# Altium PCB PCB.PcbDoc
Units mm, origin at the board's own origin, x right, y up, seen from the top; angles counter-clockwise.
Board outline 75 x 75 mm, 4 copper layers (Top Copper, Signal Layer 1, Signal Layer 2, Bottom Copper), stack 1.57 mm thick; 26 components, 65 nets, 365 pads, 71 vias.
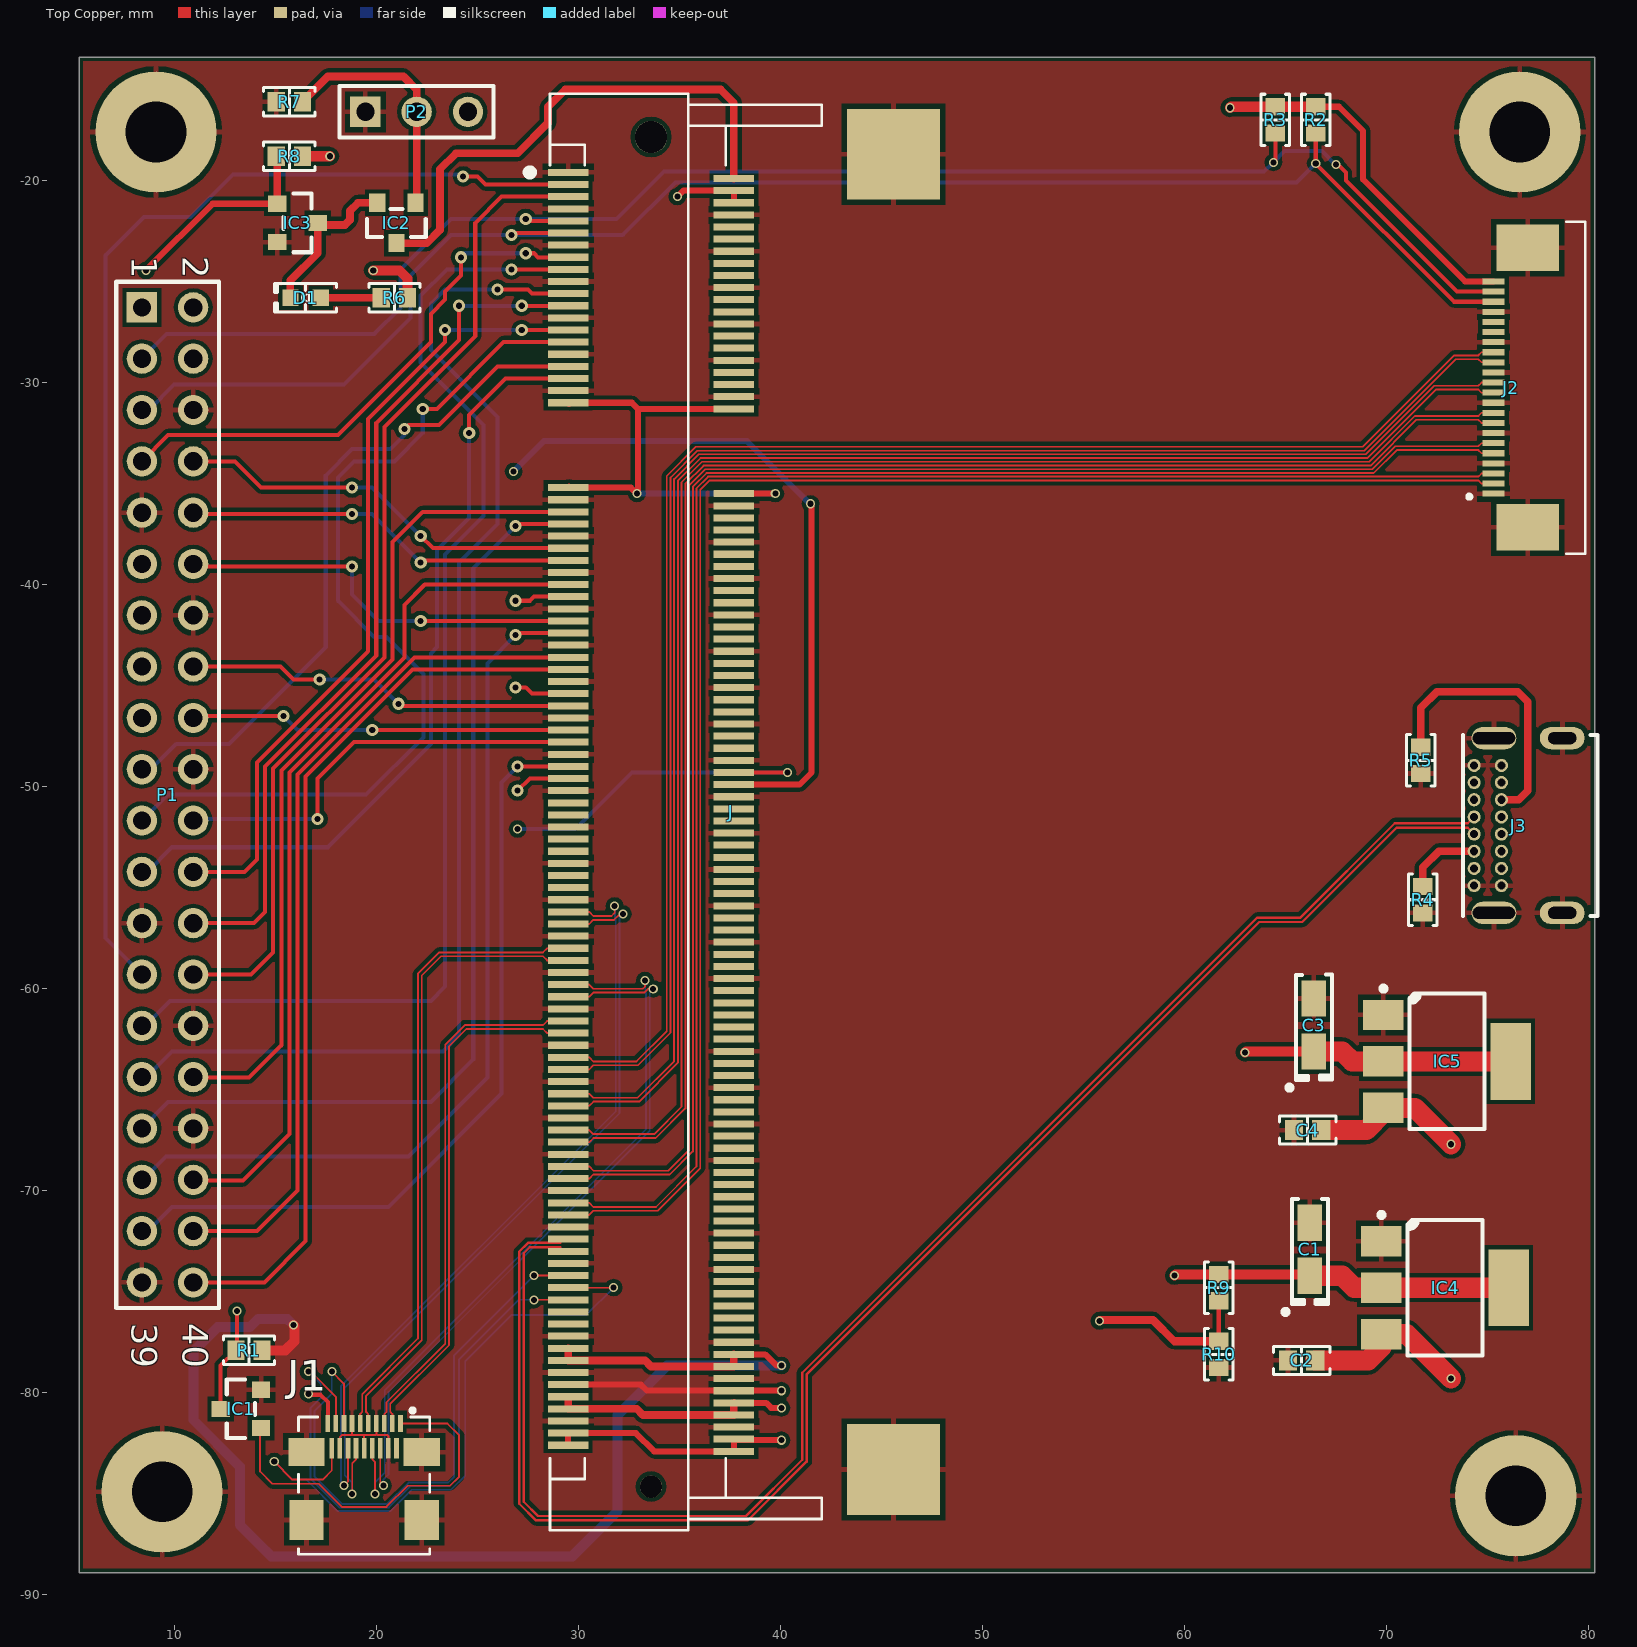
[diagram p0: Top Copper view]
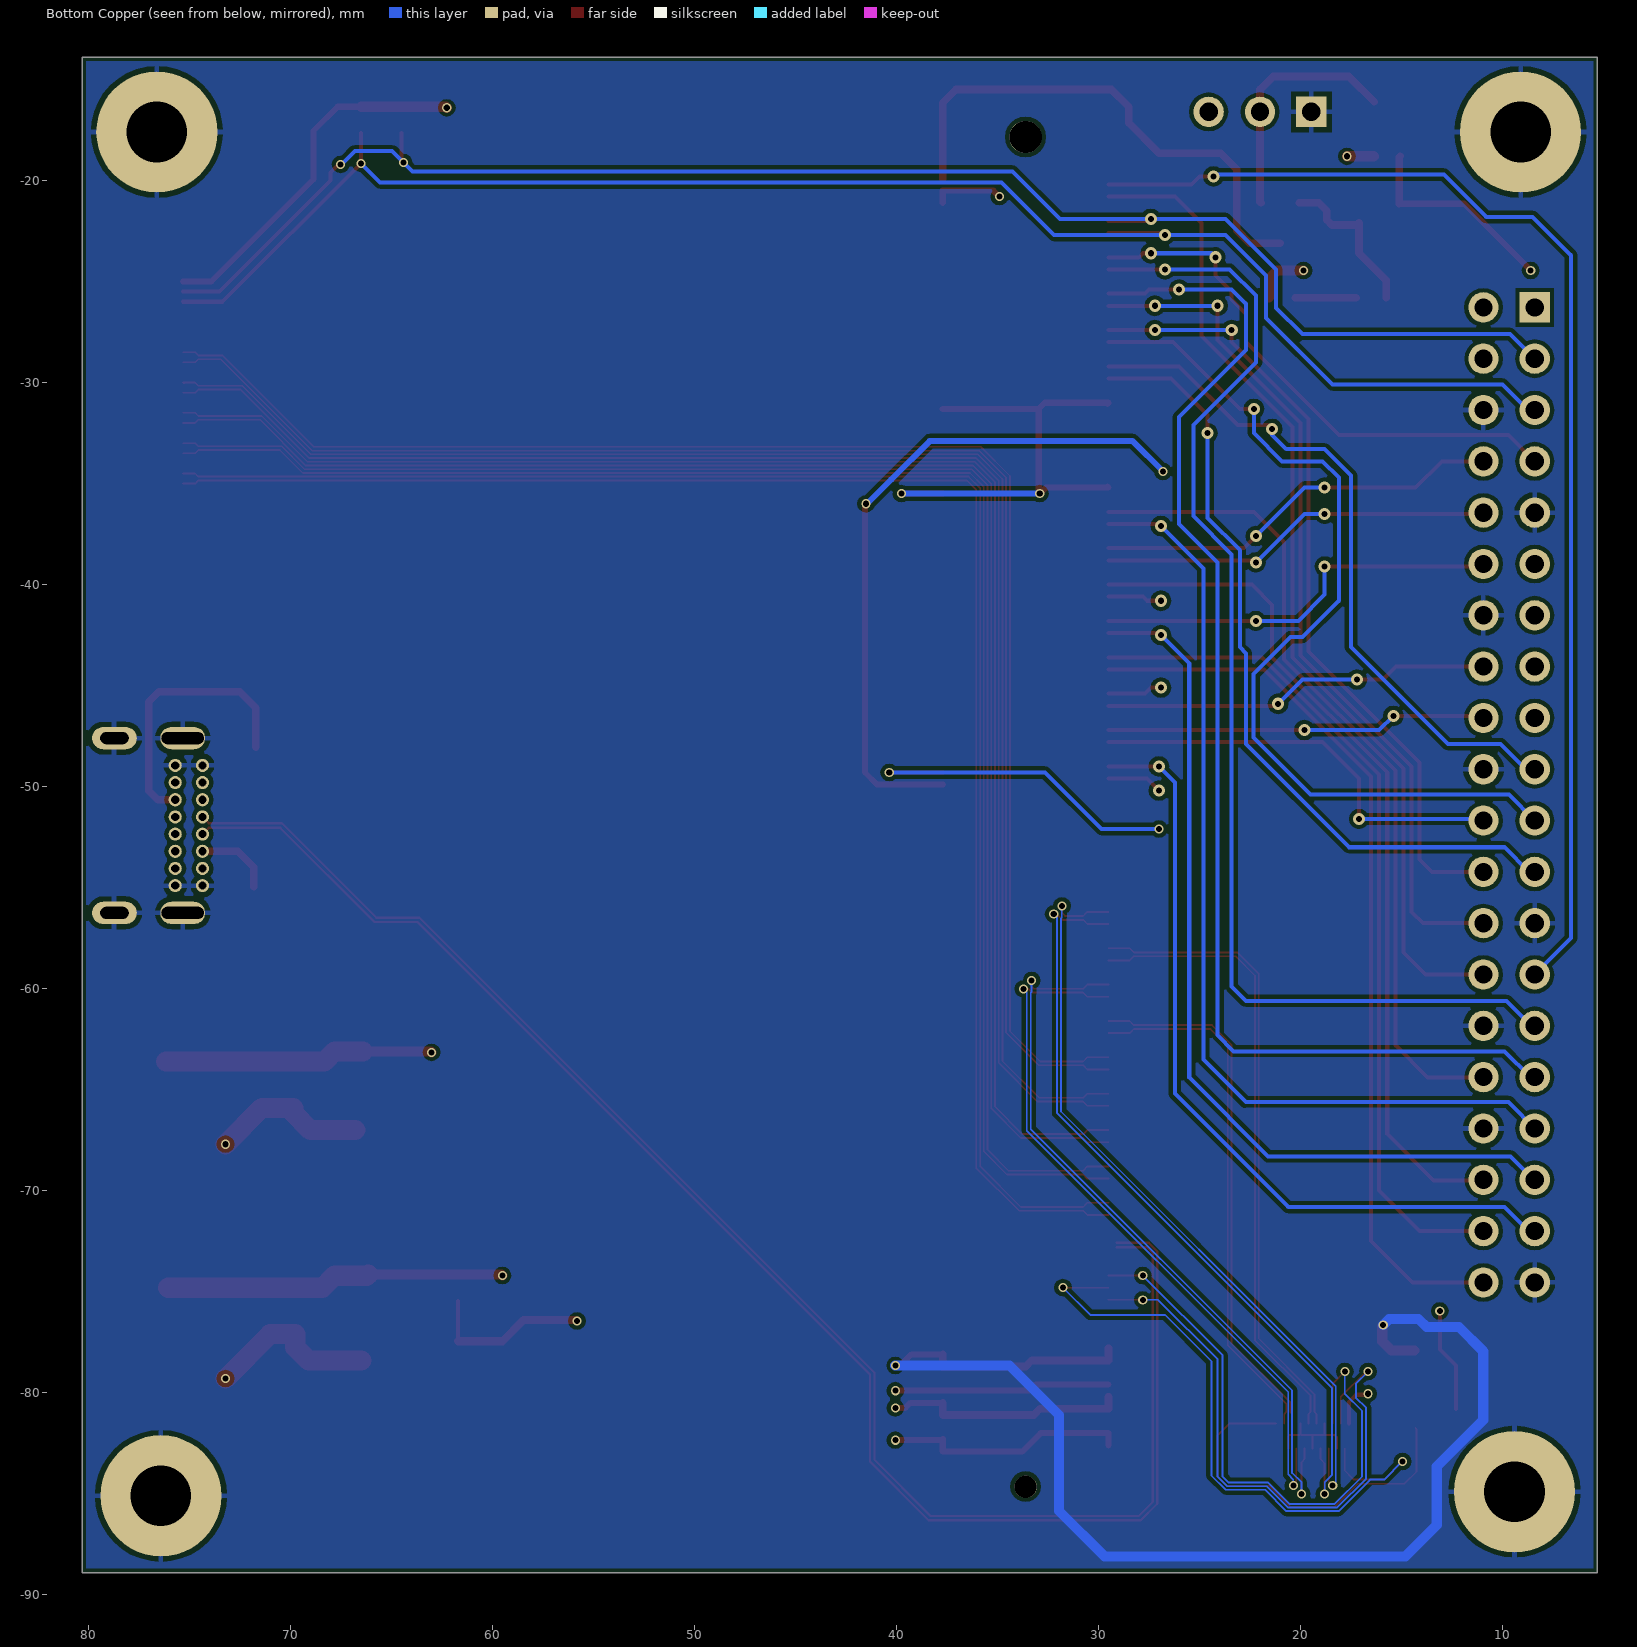
[diagram p1: Bottom Copper view, seen from below]
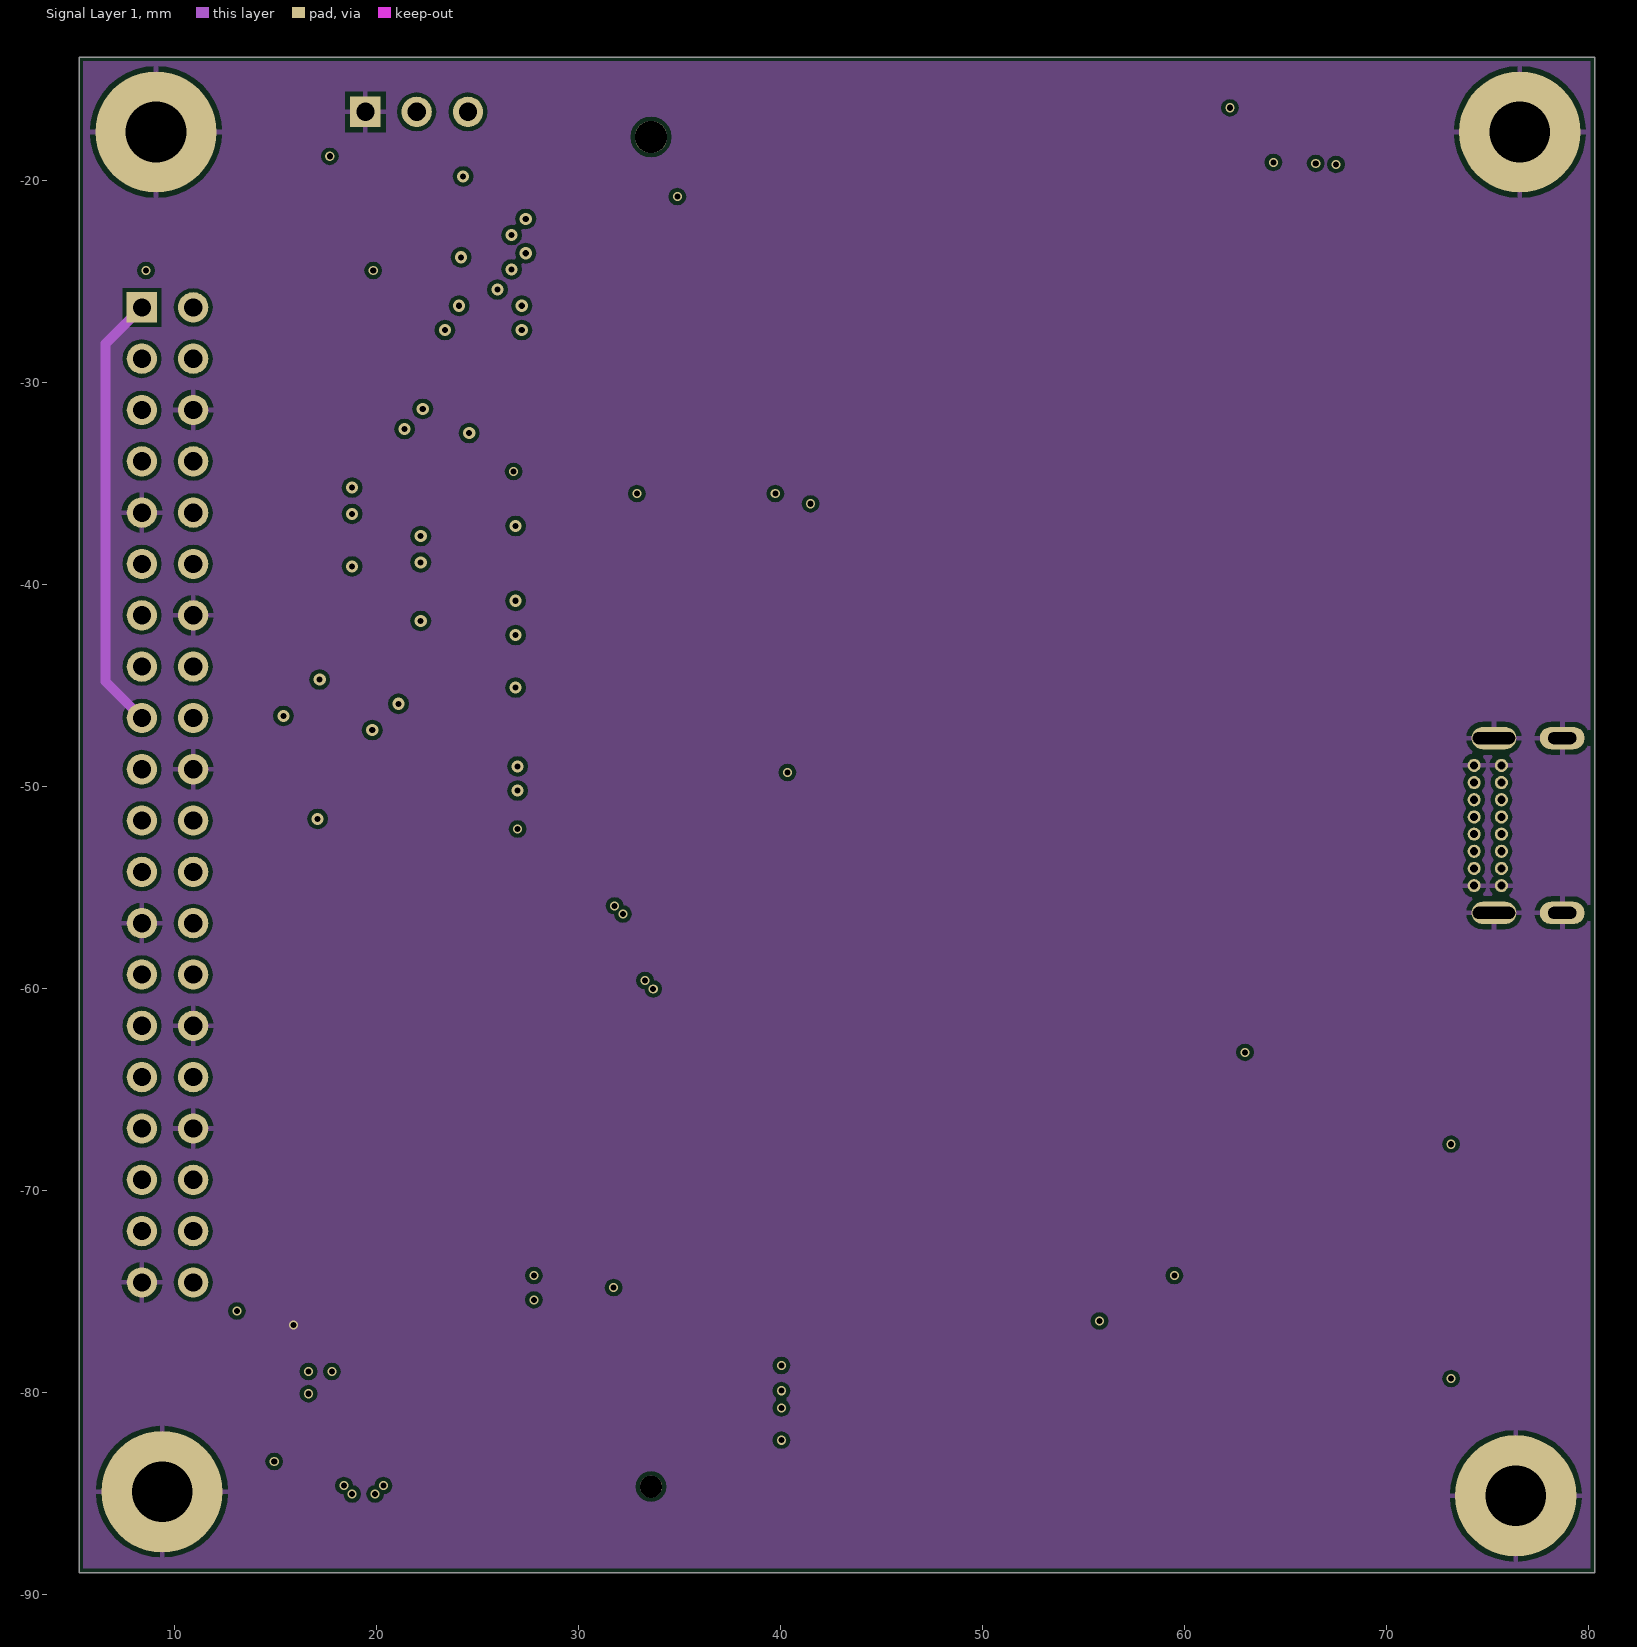
[diagram p2: Signal Layer 1]
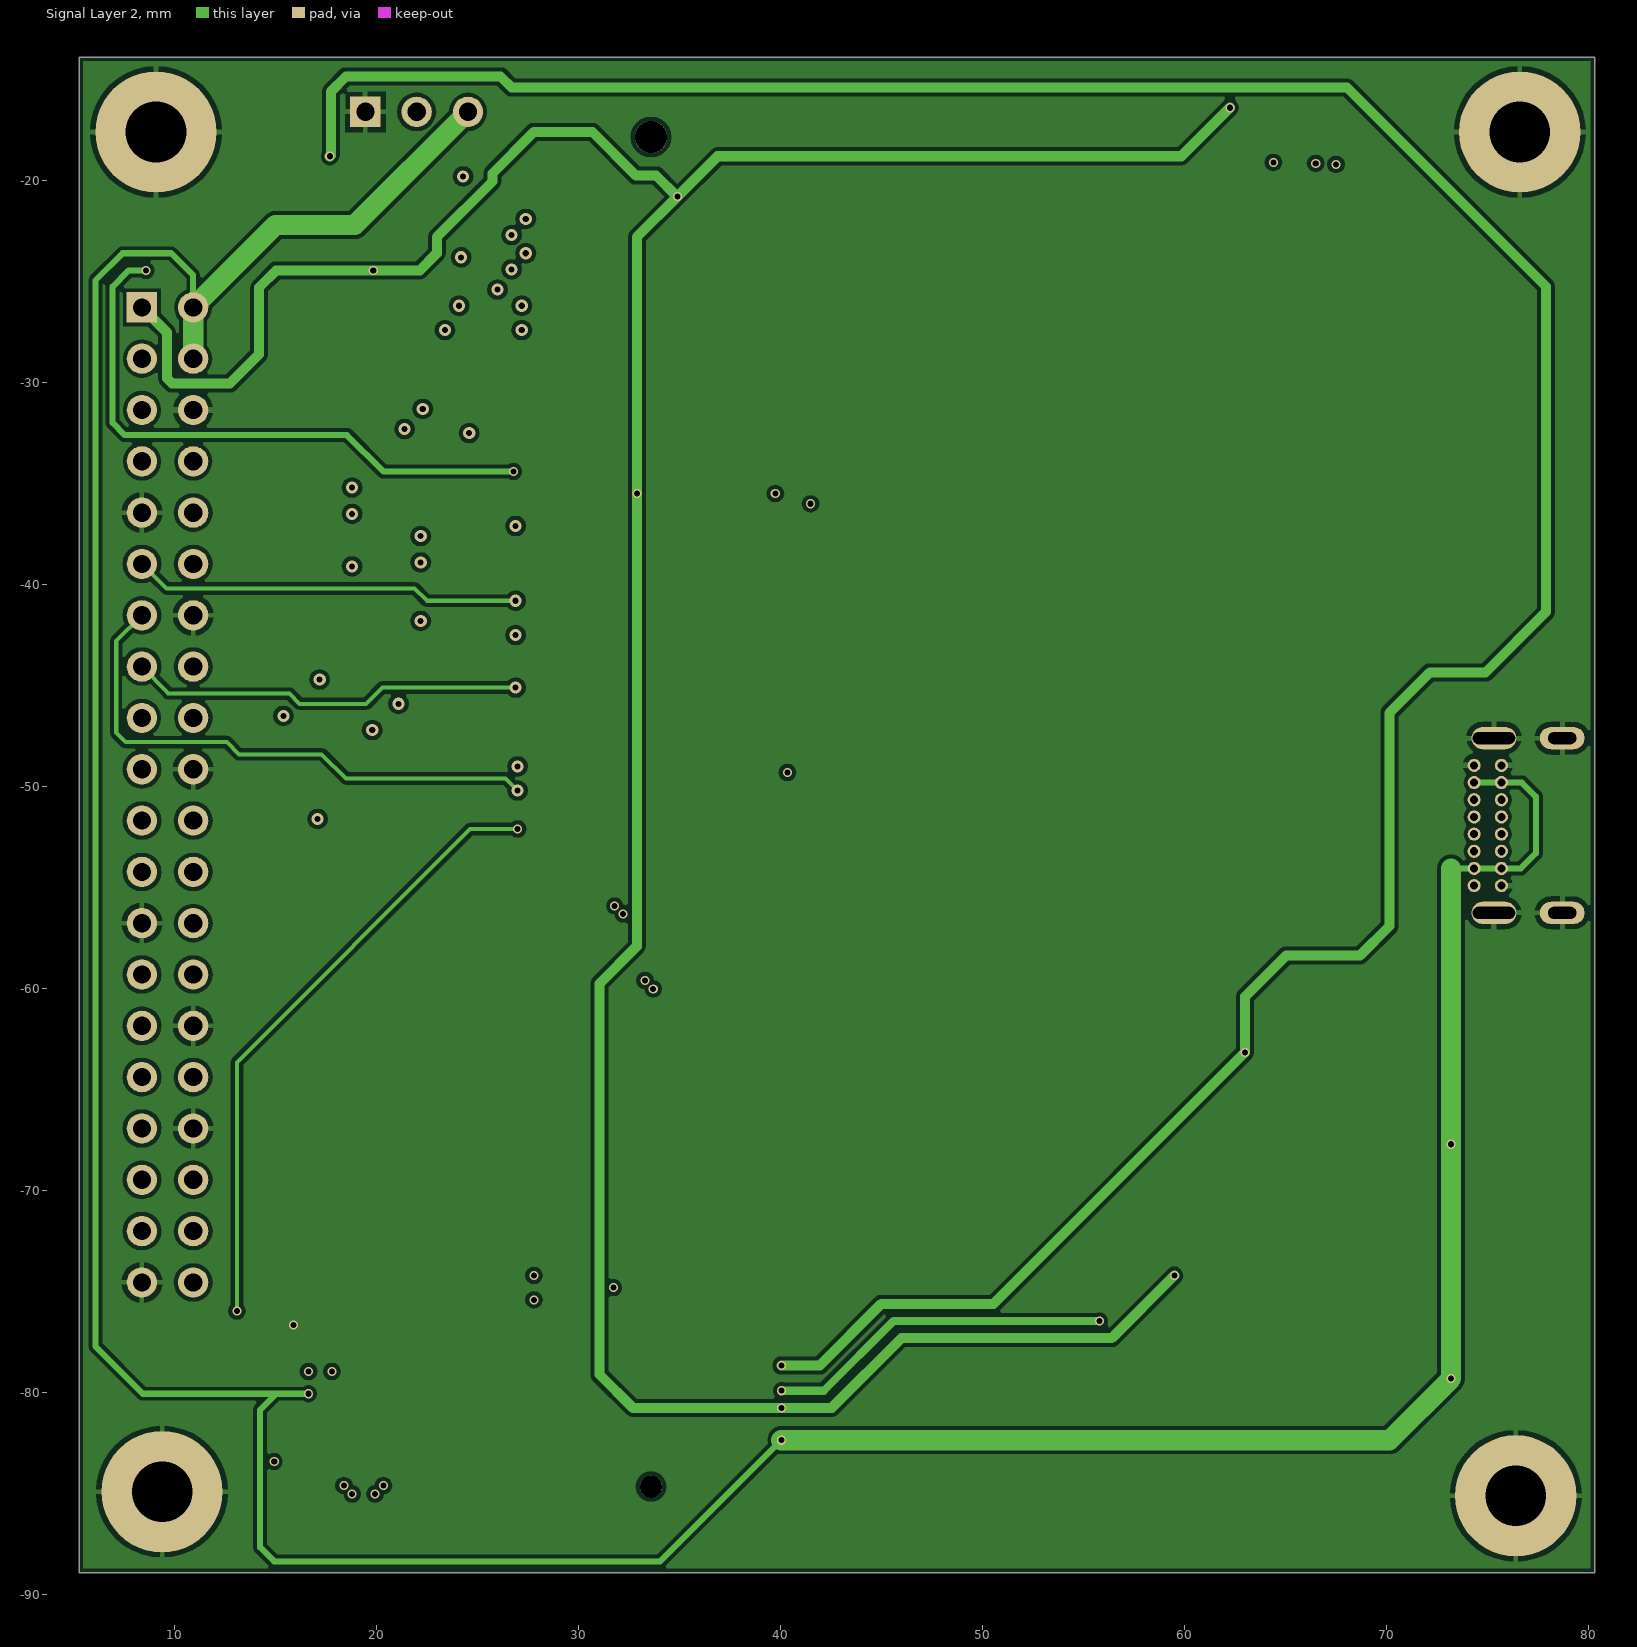
[diagram p3: Signal Layer 2]
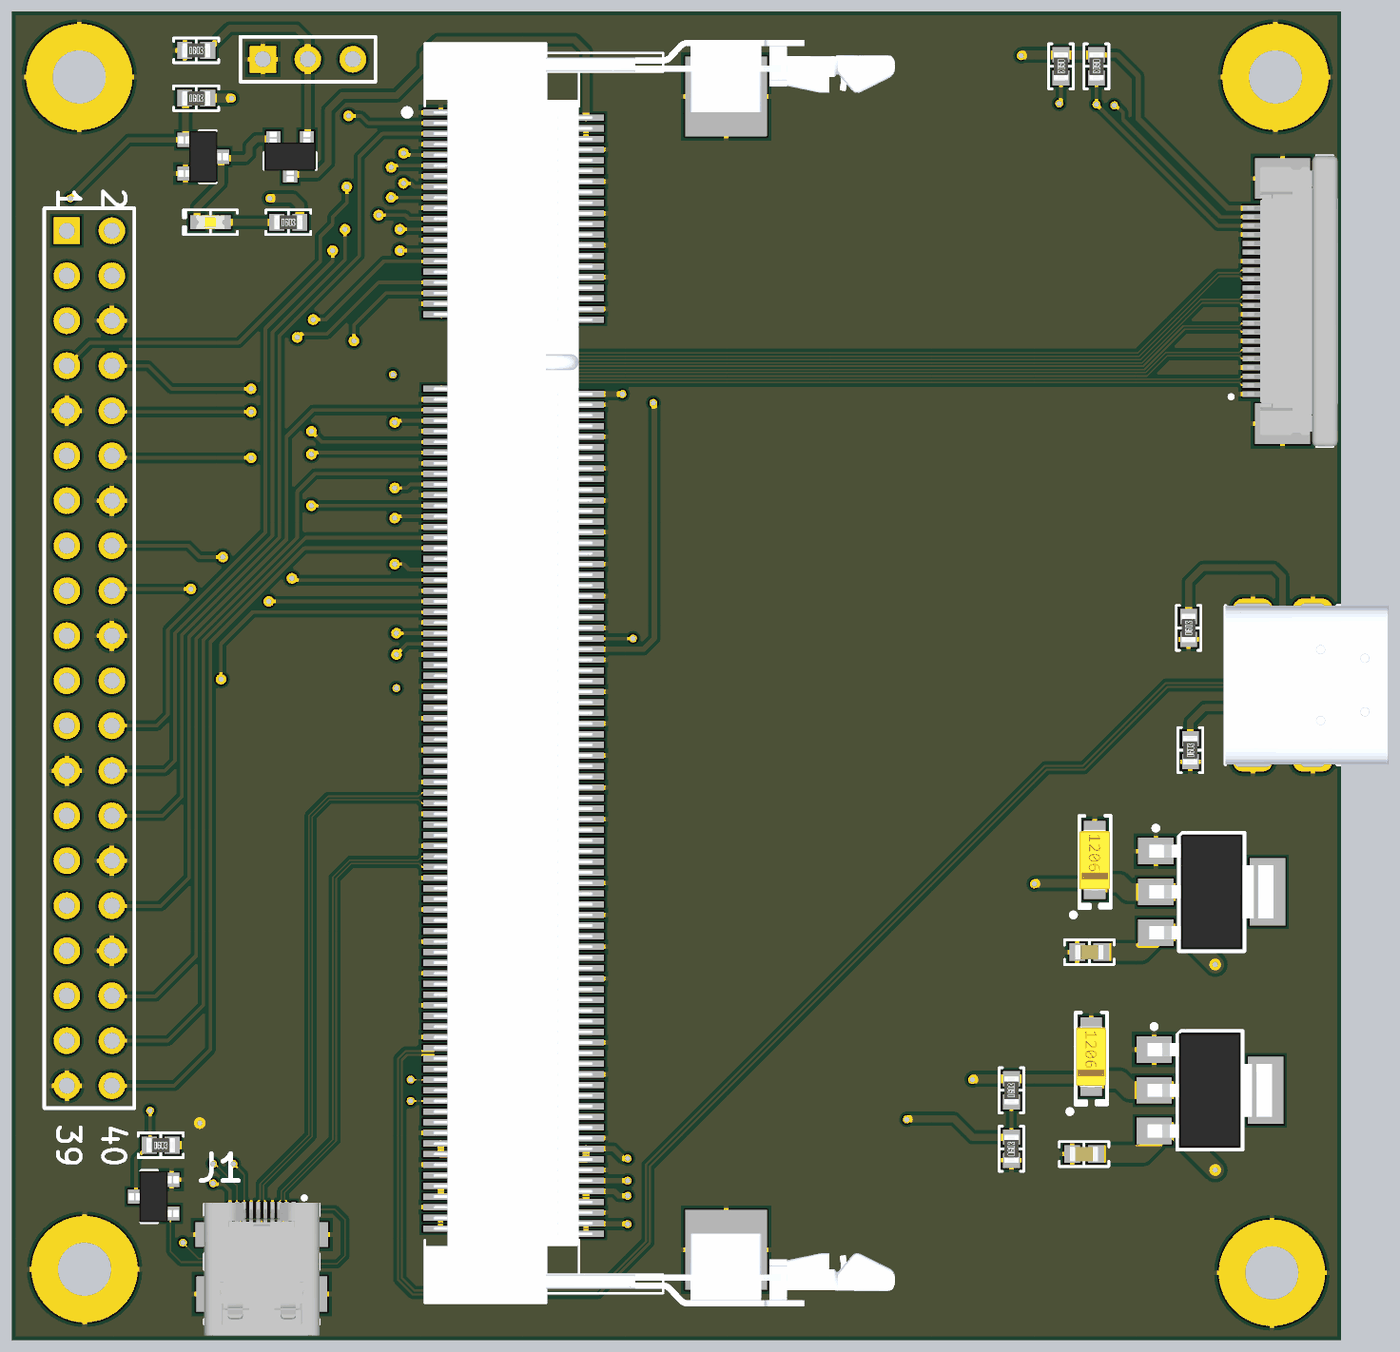
[diagram p4: 3D render of the assembled board from above, using the file's embedded part models]

## Layer stack, top to bottom
Top Mask: solder mask 0.015, Solder Resist, Dk 3.8
Top Copper: signal copper 0.035
Dielectric 1: prepreg 0.1, 2313, Dk 4.05
Signal Layer 1: signal copper 0.0175
Core: core 1.265, FR-4, Dk 4.5
Signal Layer 2: signal copper 0.0175
Dielectric 2: prepreg 0.1, 2313, Dk 4.05
Bottom Copper: signal copper 0.035
Bottom Mask: solder mask 0.015, Solder Resist, Dk 3.8

## Board outline
5.3,-13.9 80.3,-13.9 80.3,-88.9 5.3,-88.9

## Design rules (kind name [scope] priority, off if disabled: settings)
BoardOutlineClearance [All] p1: gap=0.2 ignorepadtopadclearanceinfootprint=FALSE except(0.4: Arc-SplitBarrior Arc-SplitContinuation Track-SplitBarrior Track-SplitContinuation SMDPad-SplitBarrior SMDPad-SplitContinuation THPad-SplitBarrior THPad-SplitContinuation Via-SplitBarrior Via-SplitContinuation Fill-SplitBarrior Fill-SplitContinuation Poly-SplitBarrior Poly-SplitContinuation Region-SplitBarrior Region-SplitContinuation Text-SplitBarrior Text-SplitContinuation)
Clearance "Clearance Bottom Layer" [OnLayer('Bottom Layer')] p1: gap=0.203 ignorepadtopadclearanceinfootprint=TRUE except(0.254: Arc-Text Track-Text SMDPad-Text THPad-Text Via-Text Fill-Text Poly-Text Region-Text Text-Text)
Clearance "Clearance Top Layer" [OnLayer('Top Layer')] p2: gap=0.203 ignorepadtopadclearanceinfootprint=TRUE except(0.254: Arc-Text Track-Text SMDPad-Text THPad-Text Via-Text Fill-Text Poly-Text Region-Text Text-Text)
Clearance [All] p3: gap=0.2 ignorepadtopadclearanceinfootprint=FALSE except(0.089: Arc-Arc Arc-Track Arc-SMDPad Track-Track Track-SMDPad SMDPad-SMDPad; 0.127: Arc-Via Track-Via SMDPad-Via THPad-Via Via-Via; 0.254: Arc-Text Track-Text SMDPad-Text THPad-Text Via-Text Fill-Text Poly-Text Region-Text Text-Text)
DiffPairsRouting DiffPair_CSIDiffPairsRouting [InDifferentialPairClass('CSI')] p1: maxlimit=0.102 minlimit=0.102 mostfreqgap=0.102 toplayer_minwidth=0.089 toplayer_maxwidth=0.089 toplayer_prefwidth=0.089 midlayer1_minwidth=0.089 midlayer1_maxwidth=0.089 midlayer1_prefwidth=0.089 midlayer2_minwidth=0.089 midlayer2_maxwidth=0.089 midlayer2_prefwidth=0.089 bottomlayer_minwidth=0.089 bottomlayer_maxwidth=0.089 bottomlayer_prefwidth=0.089 maxuncoupledlength=12.7
DiffPairsRouting DiffPair_HDMIDiffPairsRouting [InDifferentialPairClass('HDMI')] p2: maxlimit=0.102 minlimit=0.102 mostfreqgap=0.102 toplayer_minwidth=0.089 toplayer_maxwidth=0.089 toplayer_prefwidth=0.089 midlayer1_minwidth=0.089 midlayer1_maxwidth=0.089 midlayer1_prefwidth=0.089 midlayer2_minwidth=0.089 midlayer2_maxwidth=0.089 midlayer2_prefwidth=0.089 bottomlayer_minwidth=0.089 bottomlayer_maxwidth=0.089 bottomlayer_prefwidth=0.089 maxuncoupledlength=12.7
DiffPairsRouting DiffPair_USBDiffPairsRouting [InDifferentialPairClass('USB')] p3: maxlimit=0.102 minlimit=0.102 mostfreqgap=0.102 toplayer_minwidth=0.117 toplayer_maxwidth=0.117 toplayer_prefwidth=0.117 midlayer1_minwidth=0.117 midlayer1_maxwidth=0.117 midlayer1_prefwidth=0.117 midlayer2_minwidth=0.117 midlayer2_maxwidth=0.117 midlayer2_prefwidth=0.117 bottomlayer_minwidth=0.117 bottomlayer_maxwidth=0.117 bottomlayer_prefwidth=0.117 maxuncoupledlength=12.7
DiffPairsRouting [All] p4: maxlimit=0.254 minlimit=0.254 mostfreqgap=0.254 toplayer_minwidth=0.381 toplayer_maxwidth=0.381 toplayer_prefwidth=0.381 midlayer1_minwidth=0.381 midlayer1_maxwidth=0.381 midlayer1_prefwidth=0.381 midlayer2_minwidth=0.381 midlayer2_maxwidth=0.381 midlayer2_prefwidth=0.381 bottomlayer_minwidth=0.381 bottomlayer_maxwidth=0.381 bottomlayer_prefwidth=0.381 maxuncoupledlength=12.7
HoleSize [All] p1: absolutevalues=TRUE maxlimit=6.3 minlimit=0.2 maxpercent=80.000 minpercent=20.000
MatchedLengths DiffPair_CSIMatchedLengths [InDifferentialPairClass('CSI')] p1: tolerance=25.4 checknetsindiffpair=TRUE checkdiffpairvsdiffpair=FALSE checkxsignals=FALSE checkothers=FALSE
MatchedLengths DiffPair_HDMIMatchedLengths [InDifferentialPairClass('HDMI')] p2: tolerance=25.4 checknetsindiffpair=TRUE checkdiffpairvsdiffpair=FALSE checkxsignals=FALSE checkothers=FALSE
MatchedLengths DiffPair_USBMatchedLengths [InDifferentialPairClass('USB')] p3: tolerance=25.4 checknetsindiffpair=TRUE checkdiffpairvsdiffpair=FALSE checkxsignals=FALSE checkothers=FALSE
MinimumAnnularRing [All] p1: minimumring=0.076
MinimumSolderMaskSliver [All] p1: minsoldermaskwidth=0.1
PolygonConnect [All] p1: connectstyle=Relief reliefconductorwidth=0.254 reliefentries=4 polygonreliefangle="90 Angle" airgapwidth=0.254
RoomDefinition Sheet [InComponentClass('Sheet')] p1: confinementstyle=ConfineIn formatcopy=TRUE lockcomponents=FALSE outline -25.296,-154.408 25.504,-154.408 25.504,-129.008 -25.296,-129.008
RoutingCorners [All] p1: cornerstyle=Round minsetback=2.54 maxsetback=2.54
RoutingVias [All] p1: holewidth=0.3 width=0.45 viastyle="Through Hole" minholewidth=0.2 minwidth=0.45 maxholewidth=0.3 maxwidth=0.45
SilkToSilkClearance [All] p1: silktosilkclearance=0.1
SilkToSolderMaskClearance [IsPad] p1: minsilkscreentomaskgap=0.1 clearancetoexposedcopper=TRUE
SolderMaskExpansion [All] p1: expansion=0.102
Width [All] p1: maxlimit=2.54 minlimit=0.089 preferedwidth=0.381
24 further rules are at their usual default settings.

## Classes and differential pairs
differential pair class CSI: CAM1_CK CAM1_D0 CAM1_D1 CAM1_D2 CAM1_D3
differential pair class USB: USB_D
differential pair class HDMI: HDMI_CK HDMI_D0 HDMI_D1 HDMI_D2
differential pair USB_D: +USB_D_P -USB_D_N
differential pair HDMI_D2: +HDMI_D2_P -HDMI_D2_N
differential pair HDMI_D1: +HDMI_D1_P -HDMI_D1_N
differential pair HDMI_D0: +HDMI_D0_P -HDMI_D0_N
differential pair HDMI_CK: +HDMI_CK_P -HDMI_CK_N
differential pair CAM1_D3: +CAM1_D3_P -CAM1_D3_N
differential pair CAM1_D2: +CAM1_D2_P -CAM1_D2_N
differential pair CAM1_D1: +CAM1_D1_P -CAM1_D1_N
differential pair CAM1_D0: +CAM1_D0_P -CAM1_D0_N
differential pair CAM1_CK: +CAM1_CK_P -CAM1_CK_N

## Components (designator, comment, footprint, x,y, rotation, side; value= is the part's Value field where it differs from the comment)
C1 "10µF" "CAP POL 1206_3216" 66.2,-72.9 r90 top
C2 "0.1uF" "CAP 0603_1608" 65.8,-78.4 r0 top
C3 "10µF" "CAP POL 1206_3216" 66.4,-61.8 r90 top
C4 "0.1uF" "CAP 0603_1608" 66.1,-67 r0 top
D1 "Yellow" "LED 0603_1608 YELLOW" 16.5,-25.8 r180 top
IC1 "DMG3414U-7" "DIODES SOT-23-3" 13.3,-80.8 r180 top
IC2 "DMG3414U-7" "DIODES SOT-23-3" 21,-22.1 r270 top
IC3 "DMG3414U-7" "DIODES SOT-23-3" 16.1,-22.1 r0 top
IC4 "LD1117S33TR" "ST SOT-223" 72.9,-74.8 r0 top
IC5 "LD1117S18TR" "ST SOT-223" 73,-63.6 r0 top
J "1473149-4" TE_1473149-4 33.6,-51.25 r90 top
J1 "0467650301" MOLEX_0467650301 19.4,-81.525 r0 top
J2 "2-1734592-2" TE_2-1734592-2 75.3,-30.25 r90 top
J3 "USB4085-GF-A_REVA" GCT_USB4085-GF-A_REVA 78.365,-51.925 r90 top
P1 "Header 20X2" HDR2X20 8.4,-26.28 r270 top
P2 "Header 3" HDR1X3 19.46,-16.6 r0 top
R1 "100 kOhms" "RES 0603_1608" 13.7,-77.9 r0 top
R2 "1.8 kOhms" "RES 0603_1608" 66.5,-17 r270 top
R3 "1.8 kOhms" "RES 0603_1608" 64.5,-17 r270 top
R4 "5.1 kOhms" "RES 0603_1608" 71.8,-55.6 r90 top
R5 "5.1 kOhms" "RES 0603_1608" 71.7,-48.7 r90 top
R6 "470 Ohms" "RES 0603_1608" 20.9,-25.8 r0 top
R7 "47 kOhms" "RES 0603_1608" 15.7,-16.1 r0 top
R8 "100 kOhms" "RES 0603_1608" 15.7,-18.8 r0 top
R9 "1.8 kOhms" "RES 0603_1608" 61.7,-74.8 r90 top
R10 "10 kOhms" "RES 0603_1608" 61.7,-78.1 r90 top

## Footprints (in the part's own frame and the unit in brackets; to place one, negate y for a bottom-side part, rotate by r counter-clockwise, add the part's x,y. Pads: shape width x height; smd on the part's side, far side on the other; paste and mask are expansions set on the pad)
"CAP 0603_1608" [mm] "Chip Capacitor, 2-Leads, Body 1.60x0.80mm, IPC Medium Density"
  rect 0.9x1 smd: 1(-0.675,0) 2(0.675,0)
  silkscreen extent -1.4,-0.7 1.4,0.7, body extent -0.8,-0.41 0.8,0.41, height 0.82
"CAP POL 1206_3216" [mm] "Molded Capacitor, 2-Leads, Body 3.20x1.6mm, IPC Medium Density"
  rect 1.8x1.23 smd: 1(-1.31,0) 2(1.31,0)
  silkscreen extent -3.22,-0.9 2.5,1.32, body extent -1.72,-0.85 1.71,0.85, height 1.7
"DIODES SOT-23-3" [mm] "SOT23, 3-Leads, Body 2.90x2.40mm, Pitch 0.95mm, IPC Medium Density"
  rect 0.9x0.8 smd: 1(-1,0.95) 2(-1,-0.95) 3(1,0)
  silkscreen extent -0.7,-1.45 0.7,1.45, body extent -1.41,-1.45 1.41,1.45, height 1.5
GCT_USB4085-GF-A_REVA [mm]
  round 0.65 hole 0.4: A1(-2.975,4.025) A4(-2.125,4.025) A5(-1.275,4.025) A6(-0.425,4.025) A7(0.425,4.025) A8(1.275,4.025) A9(2.125,4.025) A12(2.975,4.025) B1(2.975,2.675) B4(2.125,2.675) B5(1.275,2.675) B6(0.425,2.675) B7(-0.425,2.675) B8(-1.275,2.675) B9(-2.125,2.675) B12(-2.975,2.675)
  oval 1.108x2.216 hole 0.6 slot 2.1 at 90 deg: P1(-4.325,3.045) P2(4.325,3.045)
  oval 1.108x2.216 hole 0.6 slot 1.4 at 90 deg: P3(4.325,-0.335) P4(-4.325,-0.335)
  silkscreen extent -4.47,-2.07 4.47,4.58, body extent -4.48,-4.58 4.48,4.58, height 3.46
HDR1X3 [mm] "Connector; Header; 3 Position"
  rect 1.5x1.5 hole 0.9: 1(0,0)
  round 1.5 hole 0.9: 2(2.54,0) 3(5.08,0)
  silkscreen extent -1.27,-1.27 6.35,1.27
HDR2X20 [mm] "Connector; Header; 20x2 Position"
  rect 1.5x1.5 hole 0.9: 1(0,0)
  round 1.5 hole 0.9: 2(0,2.54) 3(2.54,0) 4(2.54,2.54) 5(5.08,0) 6(5.08,2.54) 7(7.62,0) 8(7.62,2.54) 9(10.16,0) 10(10.16,2.54) 11(12.7,0) 12(12.7,2.54) 13(15.24,0) 14(15.24,2.54) 15(17.78,0) 16(17.78,2.54) 17(20.32,0) 18(20.32,2.54) 19(22.86,0) 20(22.86,2.54) 21(25.4,0) 22(25.4,2.54) 23(27.94,0) 24(27.94,2.54) 25(30.48,0) 26(30.48,2.54) 27(33.02,0) 28(33.02,2.54) 29(35.56,0) 30(35.56,2.54) 31(38.1,0) 32(38.1,2.54) 33(40.64,0) 34(40.64,2.54) 35(43.18,0) 36(43.18,2.54) 37(45.72,0) 38(45.72,2.54) 39(48.26,0) 40(48.26,2.54)
  silkscreen extent -1.27,-1.27 49.53,3.81
"LED 0603_1608 YELLOW" [mm] "Chip Diode, 2-Leads, Body 1.60x0.80mm, IPC Medium Density"
  rect 0.8x0.8 smd: 1(-0.75,0) 2(0.75,0)
  silkscreen extent -1.52,-0.7 1.52,0.7, body extent -0.8,-0.4 0.8,0.4, height 0.53
MOLEX_0467650301 [mm]
  rect 0.23x0.85 smd: 1(1.8,0) 3(1.4,0) 5(1,0) 7(0.6,0) 9(0.2,0) 11(-0.2,0) 13(-0.6,0) 15(-1,0) 17(-1.4,0) 19(-1.8,0)
  rect 0.23x1 smd: 2(1.6,-1.225) 4(1.2,-1.225) 6(0.8,-1.225) 8(0.4,-1.225) 10(0,-1.225) 12(-0.4,-1.225) 14(-0.8,-1.225) 16(-1.2,-1.225) 18(-1.6,-1.225)
  rect 1.8x1.38 smd: S1(-2.85,-1.415) S2(2.85,-1.415)
  rect 1.7x2 smd: S3(-2.85,-4.775) S4(2.85,-4.775)
  silkscreen extent -3.25,-6.48 3.25,0.75, body extent -3.25,-7.12 3.25,0.38, height 2.92
"RES 0603_1608" [mm] "Chip Resistor, 2-Leads, Body 1.60x0.80mm, IPC Medium Density"
  rect 0.85x0.95 smd: 1(-0.65,0) 2(0.65,0)
  silkscreen extent -1.27,-0.7 1.27,0.7, body extent -0.8,-0.4 0.8,0.4, height 0.45
"ST SOT-223" [mm] "SOT223, 4-Leads, Body 6.50x7.00mm (avg), Pitch 2.30mm, IPC Medium Density"
  rect 2x1.5 smd: 1(-3.15,2.3) 2(-3.15,0) 3(-3.15,-2.3)
  rect 2x3.8 smd: 4(3.15,0)
  silkscreen extent -3.27,-3.35 1.85,3.72, body extent -3.52,-3.25 3.5,3.25, height 1.8
TE_2-1734592-2 [mm]
  rect 0.3x1.1 smd: 1(-5.25,0) 2(-4.75,0) 3(-4.25,0) 4(-3.75,0) 5(-3.25,0) 6(-2.75,0) 7(-2.25,0) 8(-1.75,0) 9(-1.25,0) 10(-0.75,0) 11(-0.25,0) 12(0.25,0) 13(0.75,0) 14(1.25,0) 15(1.75,0) 16(2.25,0) 17(2.75,0) 18(3.25,0) 19(3.75,0) 20(4.25,0) 21(4.75,0) 22(5.25,0)
  rect 2.3x3.1 smd: S1(-6.92,-1.7) S2(6.92,-1.7)
  silkscreen extent -8.22,-4.55 8.22,1.3, body extent -8.21,-4.84 8.22,0.27, height 2
TE_1473149-4 [mm]
  rect 0.35x2 smd: 1(31.65,4.1) 2(31.35,-4.1) 3(31.05,4.1) 4(30.75,-4.1) 5(30.45,4.1) 6(30.15,-4.1) 7(29.85,4.1) 8(29.55,-4.1) 9(29.25,4.1) 10(28.95,-4.1) 11(28.65,4.1) 12(28.35,-4.1) 13(28.05,4.1) 14(27.75,-4.1) 15(27.45,4.1) 16(27.15,-4.1) 17(26.85,4.1) 18(26.55,-4.1) 19(26.25,4.1) 20(25.95,-4.1) 21(25.65,4.1) 22(25.35,-4.1) 23(25.05,4.1) 24(24.75,-4.1) 25(24.45,4.1) 26(24.15,-4.1) 27(23.85,4.1) 28(23.55,-4.1) 29(23.25,4.1) 30(22.95,-4.1) 31(22.65,4.1) 32(22.35,-4.1) 33(22.05,4.1) 34(21.75,-4.1) 35(21.45,4.1) 36(21.15,-4.1) 37(20.85,4.1) 38(20.55,-4.1) 39(20.25,4.1) 40(19.95,-4.1) 41(16.05,4.1) 42(15.75,-4.1) 43(15.45,4.1) 44(15.15,-4.1) 45(14.85,4.1) 46(14.55,-4.1) 47(14.25,4.1) 48(13.95,-4.1) 49(13.65,4.1) 50(13.35,-4.1) 51(13.05,4.1) 52(12.75,-4.1) 53(12.45,4.1) 54(12.15,-4.1) 55(11.85,4.1) 56(11.55,-4.1) 57(11.25,4.1) 58(10.95,-4.1) 59(10.65,4.1) 60(10.35,-4.1) 61(10.05,4.1) 62(9.75,-4.1) 63(9.45,4.1) 64(9.15,-4.1) 65(8.85,4.1) 66(8.55,-4.1) 67(8.25,4.1) 68(7.95,-4.1) 69(7.65,4.1) 70(7.35,-4.1) 71(7.05,4.1) 72(6.75,-4.1) 73(6.45,4.1) 74(6.15,-4.1) 75(5.85,4.1) 76(5.55,-4.1) 77(5.25,4.1) 78(4.95,-4.1) 79(4.65,4.1) 80(4.35,-4.1) 81(4.05,4.1) 82(3.75,-4.1) 83(3.45,4.1) 84(3.15,-4.1) 85(2.85,4.1) 86(2.55,-4.1) 87(2.25,4.1) 88(1.95,-4.1) 89(1.65,4.1) 90(1.35,-4.1) 91(1.05,4.1) 92(0.75,-4.1) 93(0.45,4.1) 94(0.15,-4.1) 95(-0.15,4.1) 96(-0.45,-4.1) 97(-0.75,4.1) 98(-1.05,-4.1) 99(-1.35,4.1) 100(-1.65,-4.1) 101(-1.95,4.1) 102(-2.25,-4.1) 103(-2.55,4.1) 104(-2.85,-4.1) 105(-3.15,4.1) 106(-3.45,-4.1) 107(-3.75,4.1) 108(-4.05,-4.1) 109(-4.35,4.1) 110(-4.65,-4.1) 111(-4.95,4.1) 112(-5.25,-4.1) 113(-5.55,4.1) 114(-5.85,-4.1) 115(-6.15,4.1) 116(-6.45,-4.1) 117(-6.75,4.1) 118(-7.05,-4.1) 119(-7.35,4.1) 120(-7.65,-4.1) 121(-7.95,4.1) 122(-8.25,-4.1) 123(-8.55,4.1) 124(-8.85,-4.1) 125(-9.15,4.1) 126(-9.45,-4.1) 127(-9.75,4.1) 128(-10.05,-4.1) 129(-10.35,4.1) 130(-10.65,-4.1) 131(-10.95,4.1) 132(-11.25,-4.1) 133(-11.55,4.1) 134(-11.85,-4.1) 135(-12.15,4.1) 136(-12.45,-4.1) 137(-12.75,4.1) 138(-13.05,-4.1) 139(-13.35,4.1) 140(-13.65,-4.1) 141(-13.95,4.1) 142(-14.25,-4.1) 143(-14.55,4.1) 144(-14.85,-4.1) 145(-15.15,4.1) 146(-15.45,-4.1) 147(-15.75,4.1) 148(-16.05,-4.1) 149(-16.35,4.1) 150(-16.65,-4.1) 151(-16.95,4.1) 152(-17.25,-4.1) 153(-17.55,4.1) 154(-17.85,-4.1) 155(-18.15,4.1) 156(-18.45,-4.1) 157(-18.75,4.1) 158(-19.05,-4.1) 159(-19.35,4.1) 160(-19.65,-4.1) 161(-19.95,4.1) 162(-20.25,-4.1) 163(-20.55,4.1) 164(-20.85,-4.1) 165(-21.15,4.1) 166(-21.45,-4.1) 167(-21.75,4.1) 168(-22.05,-4.1) 169(-22.35,4.1) 170(-22.65,-4.1) 171(-22.95,4.1) 172(-23.25,-4.1) 173(-23.55,4.1) 174(-23.85,-4.1) 175(-24.15,4.1) 176(-24.45,-4.1) 177(-24.75,4.1) 178(-25.05,-4.1) 179(-25.35,4.1) 180(-25.65,-4.1) 181(-25.95,4.1) 182(-26.25,-4.1) 183(-26.55,4.1) 184(-26.85,-4.1) 185(-27.15,4.1) 186(-27.45,-4.1) 187(-27.75,4.1) 188(-28.05,-4.1) 189(-28.35,4.1) 190(-28.65,-4.1) 191(-28.95,4.1) 192(-29.25,-4.1) 193(-29.55,4.1) 194(-29.85,-4.1) 195(-30.15,4.1) 196(-30.45,-4.1) 197(-30.75,4.1) 198(-31.05,-4.1) 199(-31.35,4.1) 200(-31.65,-4.1)
  rect 4.5x4.6 smd: SH1(-32.55,-12) SH2(32.55,-12)
  round 1.1 hole 1.1 unplated: ""(-33.4,0)
  round 1.6 hole 1.6 unplated: ""(33.4,0)
  silkscreen extent -35.55,-8.45 35.55,6.1, body extent -35.75,-21.52 35.75,5.02, height 5.86

## Part data
C1 C3: library part TR3A475K020C1800, "CAP TANT 4.7UF 10% 20V 1206", Capacitance=4.7µF, Device Package="1206 (3216 Metric)", ESR (Equivalent Series Resistance)=1.8Ohm, Manufacturer="Vishay Sprague", Manufacturer Size Code=A, Operating Temperature="-55°C ~ 125°C", Supplier Part Number 1=718-1830-1-ND, Tolerance=±10%, Voltage - Rated=20V, ComponentLink1Description=Datasheet, ComponentLink1URL=http://www.vishay.com/docs/40080/tr3.pdf, ComponentLink2Description="DigiKey Link", ComponentLink2URL=http://digikey.com/product-detail/en/vishay-sprague/TR3A475K020C1800/718-1830-1-ND/2259990, Features="General Purpose", Height - Seated (Max)="0.071\" (1.80mm)", LastUpdated="02-09-2020 1.15.59 AM", Lifecycle Status=Active, Minimum Order=1, Mounting Type="Surface Mount", Package / Case="1206 (3216 Metric)", Packaging=TapeAndReel, PartId=139, Part Number=TR3A475K020C1800, Part Status=Active, Price=0.35, Series="TANTAMOUNT®, TR3", Size / Dimension="0.126\" L x 0.063\" W (3.20mm x 1.60mm)", Supplier 1=DigiKey, Type=Molded
C2 C4: library part CC0603KRX7RABB102, "CAP CER 0.1uF 200V X7R 0603", Capacitance=1000pF, Device Package="0603 (1608 Metric)", Manufacturer=Yageo, Operating Temperature="-55°C ~ 125°C", Supplier Part Number 1=311-4103-1-ND, Temperature Coefficient=X7R, Tolerance=±10%, Voltage - Rated=200V, Applications="General Purpose", ComponentLink1Description=Datasheet, ComponentLink1URL=http://www.yageo.com/documents/recent/UPY-NP0X7R_MV_100-to-630V_21.pdf, ComponentLink2Description="DigiKey Link", ComponentLink2URL=http://digikey.com/product-detail/en/yageo/CC0603KRX7RABB102/311-4103-1-ND/8025192, LastUpdated="02-09-2020 1.03.36 AM", Lifecycle Status=Active, Minimum Order=1, Mounting Type="Surface Mount, MLCC", Package / Case="0603 (1608 Metric)", Packaging=TapeAndReel, PartId=2225, Part Number=CC0603KRX7RABB102, Part Status=Active, Price=0.02, Series=CC, Size / Dimension="0.063\" L x 0.031\" W (1.60mm x 0.80mm)", Supplier 1=DigiKey, Thickness (Max)="0.035\" (0.90mm)"
D1: library part FKY1111C-TR, "LED YELLOW DIFFUSED SMD", Current - Test=20mA, Device Package="0603 (1608 Metric)", Lens Color=White, Manufacturer="Stanley Electric Co", Millicandela Rating=270mcd, Supplier Device Package=1608, Supplier Part Number 1=404-1273-1-ND, Voltage - Forward (Vf) (Typ)=2.1V, Color=Yellow, ComponentLink1Description=Datasheet, ComponentLink1URL=http://www.stanley-components.com/php/downloaddatafile.php?rp=0,FKY1111C-TR_e.pdf, ComponentLink2Description="DigiKey Link", ComponentLink2URL=http://digikey.com/product-detail/en/stanley-electric-co/FKY1111C-TR/404-1273-1-ND/9477278, Configuration=Standard, Height (Max)=0.80mm, LastUpdated="02-09-2020 1.21.17 AM", Lens Size="1.20mm x 0.80mm", Lens Style="Rectangle with Flat Top", Lens Transparency=Diffused, Lifecycle Status=Active, Minimum Order=1, Mounting Type="Surface Mount", Package / Case="0603 (1608 Metric)", Packaging=TapeAndReel, PartId=154, Part Number=FKY1111C-TR, Part Status=Active, Price=0.11, Series=1111C, Size / Dimension="1.60mm L x 0.80mm W", Supplier 1=DigiKey, Wavelength - Dominant=589nm, Wavelength - Peak=592nm
IC1 IC2 IC3: "MOSFET N-CH 20V 4.2A SOT23", Current - Continuous Drain (Id) @ 25°C="4.2A (Ta)", Drain to Source Voltage (Vdss)=20V, Drive Voltage (Max Rds On,  Min Rds On)="1.8V, 4.5V", Input Capacitance (Ciss) (Max) @ Vds="829.9pF @ 10V", Manufacturer="Diodes Incorporated", Operating Temperature="-55°C ~ 150°C (TJ)", Package / Case="TO-236-3, SC-59, SOT-23-3", Power Dissipation (Max)="780mW (Ta)", Supplier Device Package=SOT-23-3, Supplier Part Number 1=DMG3414U-7DICT-ND, ComponentLink1Description=Datasheet, ComponentLink1URL=https://www.diodes.com/assets/Datasheets/ds31739.pdf, ComponentLink2Description="DigiKey Link", ComponentLink2URL=http://digikey.com/product-detail/en/diodes-incorporated/DMG3414U-7/DMG3414U-7DICT-ND/2183251, FET Type=N-Channel, Gate Charge (Qg) (Max) @ Vgs="9.6nC @ 4.5V", LastUpdated="02-09-2020 1.25.02 AM", Lifecycle Status=Active, Minimum Order=1, Mounting Type="Surface Mount", Packaging=TapeAndReel, Part Number=DMG3414U-7, Part Status=Active, Price=0.16, Rds On (Max) @ Id, Vgs="25mOhm @ 8.2A, 4.5V", Series=-, Supplier 1=DigiKey, Technology="MOSFET (Metal Oxide)", Vgs (Max)=±8V, Vgs(th) (Max) @ Id="900mV @ 250µA"
IC4: "IC REG LINEAR 3.3V 800MA SOT223", Current - Output=800mA, Current - Quiescent (Iq)=10mA, Manufacturer=STMicroelectronics, Package / Case="TO-261-4, TO-261AA", Supplier Device Package=SOT-223, Supplier Part Number 1=497-1242-1-ND, Voltage - Input (Max)=15V, Voltage - Output (Min/Fixed)=3.3V, Voltage Dropout (Max)="1.2V @ 800mA", ComponentLink1Description=Datasheet, ComponentLink1URL=http://www.st.com/content/ccc/resource/technical/document/datasheet/99/3b/7d/91/91/51/4b/be/CD00000544.pdf/files/CD00000544.pdf/jcr:content/translations/en.CD00000544.pdf, ComponentLink2Description="DigiKey Link", ComponentLink2URL=http://digikey.com/product-detail/en/stmicroelectronics/LD1117S33TR/497-1242-1-ND/586242, LastUpdated="02-09-2020 1.24.39 AM", Lifecycle Status=Active, Minimum Order=1, Mounting Type="Surface Mount", Number of Regulators=1, Output Configuration=Positive, Output Type=Fixed, Packaging=TapeAndReel, Part Number=LD1117S33TR, Part Status=Active, Price=0.14, Protection Features="Over Current, Over Temperature", PSRR="75dB (120Hz)", Series=-, Supplier 1=DigiKey
IC5: "IC REG LINEAR 1.8V 800MA SOT223", Current - Output=800mA, Current - Quiescent (Iq)=10mA, Manufacturer=STMicroelectronics, Package / Case="TO-261-4, TO-261AA", Supplier Device Package=SOT-223, Supplier Part Number 1=497-7308-1-ND, Voltage - Input (Max)=15V, Voltage - Output (Min/Fixed)=1.8V, Voltage Dropout (Max)="1.2V @ 800mA", ComponentLink1Description=Datasheet, ComponentLink1URL=http://www.st.com/content/ccc/resource/technical/document/datasheet/99/3b/7d/91/91/51/4b/be/CD00000544.pdf/files/CD00000544.pdf/jcr:content/translations/en.CD00000544.pdf, ComponentLink2Description="DigiKey Link", ComponentLink2URL=http://digikey.com/product-detail/en/stmicroelectronics/LD1117S18TR/497-7308-1-ND/1883983, LastUpdated="02-09-2020 1.24.39 AM", Lifecycle Status=Active, Minimum Order=1, Mounting Type="Surface Mount", Number of Regulators=1, Output Configuration=Positive, Output Type=Fixed, Packaging=TapeAndReel, Part Number=LD1117S18TR, Part Status=Active, Price=0.19, Protection Features="Over Current, Over Temperature", PSRR="75dB (120Hz)", Series=-, Supplier 1=DigiKey
J: "200 Position Dual Row 0.60mm Surface Mount Right Angle DIMM Memory Socket", Package=None, Availability=Unavailable, Centerline_Pitch=".6 mm[.024 in]", MF="TE Connectivity", MP=1473149-4, Number_of_Positions=200, Price=None, Product_Type=Socket, SnapEDA_Link=https://www.snapeda.com/parts/1473149-4/TE%20Connectivity%20AMP%20Connectors/view-part/798476/?ref=snap, TE_purchase_URL=https://www.te.com/usa-en/product-1473149-4.html?te_bu=Cor&te_type=disp&te_campaign=seda_glo_cor-seda-global-disp-prtnr-fy19-seda-model-bom-cta_sma-317_1&elqCampaignId=32493
J1: "HDMI - Micro Receptacle Connector 19 Position Surface Mount, Right Angle", Package=None, Availability=Unavailable, MF=Molex, MP=0467650301, Price=None, SnapEDA_Link=https://www.snapeda.com/parts/0467650301/Molex/view-part/2155824/?ref=snap
J2: "22 Position FPC Connector Contacts, Bottom 0.020 _0.50mm_ Surface Mount, Right Angle", Package=None, Availability=Unavailable, MF="TE Connectivity", MP=2-1734592-2, Price=None, SnapEDA_Link=https://www.snapeda.com/parts/2-1734592-2/TE%20Connectivity/view-part/4788509/?ref=snap, TE_purchase_URL=https://www.te.com/usa-en/product-2-1734592-2.html?te_bu=Cor&te_type=disp&te_campaign=seda_glo_cor-seda-global-disp-prtnr-fy19-seda-model-bom-cta_sma-317_1&elqCampaignId=32493
J3: "USB-C (USB TYPE-C) USB 2.0 Receptacle Connector 24 (16+8 Dummy) Position Through Hole, Right Angle", Package=Package, Availability=Warning, Check_prices=https://www.snapeda.com/parts/USB4085-GF-A/Global%20Connector%20Technology/view-part/2780390/?ref=eda, MF="Global Connector Technology", MP=USB4085-GF-A, Price=None, Purchase-URL=https://pricing.snapeda.com/search/part/USB4085-GF-A/?ref=eda, SnapEDA_Link=https://www.snapeda.com/parts/USB4085-GF-A/Global%20Connector%20Technology/view-part/2780390/?ref=snap
P1: "Header, 20-Pin, Dual row", LatestRevisionDate=17-Jul-2002, LatestRevisionNote="Re-released for DXP Platform.", Publisher="Altium Limited"
P2: "Header, 3-Pin", LatestRevisionDate=17-Jul-2002, LatestRevisionNote="Re-released for DXP Platform.", Publisher="Altium Limited"
R1 R8: library part RNCS0603BKE100K, "RES 100K OHM 0.1% 1/16W 0603", Device Package="0603 (1608 Metric)", Manufacturer="Stackpole Electronics Inc", Operating Temperature="-55°C ~ 155°C", Power (Watts)="0.063W, 1/16W", Ratings=AEC-Q200, Supplier Device Package=0603, Supplier Part Number 1=RNCS0603BKE100KCT-ND, Temperature Coefficient=±25ppm/°C, Tolerance=±0.1%, ComponentLink1Description=Datasheet, ComponentLink1URL=https://www.seielect.com/catalog/sei-rncs_rnch.pdf, ComponentLink2Description="DigiKey Link", ComponentLink2URL=http://digikey.com/product-detail/en/stackpole-electronics-inc/RNCS0603BKE100K/RNCS0603BKE100KCT-ND/1800112, Composition="Thin Film", Features="Anti-Corrosive, Automotive AEC-Q200, Moisture Resistant", Height - Seated (Max)="0.022\" (0.55mm)", LastUpdated="02-09-2020 1.10.25 AM", Lifecycle Status=Active, Minimum Order=1, Number of Terminations=2, Package / Case="0603 (1608 Metric)", Packaging=TapeAndReel, PartId=4849, Part Number=RNCS0603BKE100K, Part Status=Active, Price=0.08, Resistance="100 kOhms", Series=RNCS, Size / Dimension="0.061\" L x 0.031\" W (1.55mm x 0.80mm)", Supplier 1=DigiKey
R2 R3 R9: library part RMCF0603JT1K80, "RES 1.8K OHM 5% 1/10W 0603", Device Package="0603 (1608 Metric)", Manufacturer="Stackpole Electronics Inc", Operating Temperature="-55°C ~ 155°C", Power (Watts)="0.1W, 1/10W", Ratings=AEC-Q200, Supplier Device Package=0603, Supplier Part Number 1=RMCF0603JT1K80CT-ND, Temperature Coefficient=±200ppm/°C, Tolerance=±5%, ComponentLink1Description=Datasheet, ComponentLink1URL=https://www.seielect.com/catalog/sei-rmcf_rmcp.pdf, ComponentLink2Description="DigiKey Link", ComponentLink2URL=http://digikey.com/product-detail/en/stackpole-electronics-inc/RMCF0603JT1K80/RMCF0603JT1K80CT-ND/1943176, Composition="Thick Film", Features="Automotive AEC-Q200", Height - Seated (Max)="0.022\" (0.55mm)", LastUpdated="02-09-2020 1.10.23 AM", Lifecycle Status=Active, Minimum Order=1, Number of Terminations=2, Package / Case="0603 (1608 Metric)", Packaging=CutTape, PartId=5907, Part Number=RMCF0603JT1K80, Part Status=Active, Price=0.10, Resistance="1.8 kOhms", Series=RMCF, Size / Dimension="0.061\" L x 0.031\" W (1.55mm x 0.80mm)", Supplier 1=DigiKey
R4 R5: library part RMCF0603JG5K10, "RES 5.1K OHM 5% 1/10W 0603", Device Package="0603 (1608 Metric)", Manufacturer="Stackpole Electronics Inc", Operating Temperature="-55°C ~ 155°C", Power (Watts)="0.1W, 1/10W", Ratings=AEC-Q200, Supplier Device Package=0603, Supplier Part Number 1=RMCF0603JG5K10CT-ND, Temperature Coefficient=±200ppm/°C, Tolerance=±5%, ComponentLink1Description=Datasheet, ComponentLink1URL=https://www.seielect.com/catalog/sei-packaging.pdf, ComponentLink2Description="DigiKey Link", ComponentLink2URL=http://digikey.com/product-detail/en/stackpole-electronics-inc/RMCF0603JG5K10/RMCF0603JG5K10CT-ND/4425135, Composition="Thick Film", Features="Automotive AEC-Q200", Height - Seated (Max)="0.022\" (0.55mm)", LastUpdated="02-09-2020 1.10.24 AM", Lifecycle Status=Active, Minimum Order=1, Number of Terminations=2, Package / Case="0603 (1608 Metric)", Packaging=CutTape, PartId=5180, Part Number=RMCF0603JG5K10, Part Status=Active, Price=0.10, Resistance="5.1 kOhms", Series=RMCF, Size / Dimension="0.061\" L x 0.031\" W (1.55mm x 0.80mm)", Supplier 1=DigiKey
R6: library part RMCF0603FT470R, "RES 470 OHM 1% 1/10W 0603", Device Package="0603 (1608 Metric)", Manufacturer="Stackpole Electronics Inc", Operating Temperature="-55°C ~ 155°C", Power (Watts)="0.1W, 1/10W", Ratings=AEC-Q200, Supplier Device Package=0603, Supplier Part Number 1=RMCF0603FT470RCT-ND, Temperature Coefficient=±100ppm/°C, Tolerance=±1%, ComponentLink1Description=Datasheet, ComponentLink1URL=https://www.seielect.com/catalog/sei-rmcf_rmcp.pdf, ComponentLink2Description="DigiKey Link", ComponentLink2URL=http://digikey.com/product-detail/en/stackpole-electronics-inc/RMCF0603FT470R/RMCF0603FT470RCT-ND/1942986, Composition="Thick Film", Features="Automotive AEC-Q200", Height - Seated (Max)="0.022\" (0.55mm)", LastUpdated="02-09-2020 1.10.22 AM", Lifecycle Status=Active, Minimum Order=1, Number of Terminations=2, Package / Case="0603 (1608 Metric)", Packaging=CutTape, PartId=6081, Part Number=RMCF0603FT470R, Part Status=Active, Price=0.10, Resistance="470 Ohms", Series=RMCF, Size / Dimension="0.061\" L x 0.031\" W (1.55mm x 0.80mm)", Supplier 1=DigiKey
R7: library part CPF0603B47KE, "RES SMD 47K OHM 0.1% 1/16W 0603", Device Package="0603 (1608 Metric)", Manufacturer="TE Connectivity Passive Product", Operating Temperature="-55°C ~ 155°C", Power (Watts)="0.063W, 1/16W", Supplier Device Package=0603, Supplier Part Number 1=A119911CT-ND, Temperature Coefficient=±25ppm/°C, Tolerance=±0.1%, ComponentLink1Description=Datasheet, ComponentLink1URL=https://www.te.com/commerce/DocumentDelivery/DDEController?Action=srchrtrv&DocNm=1773200&DocType=DS&DocLang=English, ComponentLink2Description="DigiKey Link", ComponentLink2URL=http://digikey.com/product-detail/en/te-connectivity-passive-product/CPF0603B47KE/A119911CT-ND/4966509, Composition="Thin Film", Height - Seated (Max)="0.022\" (0.55mm)", LastUpdated="02-09-2020 1.10.16 AM", Lifecycle Status=Active, Minimum Order=1, Number of Terminations=2, Package / Case="0603 (1608 Metric)", Packaging=TapeAndReel, PartId=9346, Part Number=CPF0603B47KE, Part Status=Active, Price=0.09, Resistance="47 kOhms", Series="CPF, Neohm", Size / Dimension="0.061\" L x 0.031\" W (1.55mm x 0.80mm)", Supplier 1=DigiKey
R10: library part RNCS0603BKE10K0, "RES 10K OHM 0.1% 1/16W 0603", Device Package="0603 (1608 Metric)", Manufacturer="Stackpole Electronics Inc", Operating Temperature="-55°C ~ 155°C", Power (Watts)="0.063W, 1/16W", Ratings=AEC-Q200, Supplier Device Package=0603, Supplier Part Number 1=RNCS0603BKE10K0CT-ND, Temperature Coefficient=±25ppm/°C, Tolerance=±0.1%, ComponentLink1Description=Datasheet, ComponentLink1URL=https://www.seielect.com/catalog/sei-rncs_rnch.pdf, ComponentLink2Description="DigiKey Link", ComponentLink2URL=http://digikey.com/product-detail/en/stackpole-electronics-inc/RNCS0603BKE10K0/RNCS0603BKE10K0CT-ND/1800113, Composition="Thin Film", Features="Anti-Corrosive, Automotive AEC-Q200, Moisture Resistant", Height - Seated (Max)="0.022\" (0.55mm)", LastUpdated="02-09-2020 1.10.25 AM", Lifecycle Status=Active, Minimum Order=1, Number of Terminations=2, Package / Case="0603 (1608 Metric)", Packaging=TapeAndReel, PartId=4838, Part Number=RNCS0603BKE10K0, Part Status=Active, Price=0.08, Resistance="10 kOhms", Series=RNCS, Size / Dimension="0.061\" L x 0.031\" W (1.55mm x 0.80mm)", Supplier 1=DigiKey

## Free pads (board coordinates)
  round 6 hole 3 paste+0: PTH1(9.1,-17.6) PTH2(76.6,-17.6) PTH3(76.4,-85.1) PTH4(9.4,-84.9)

## Via types
v1: diameter 0.45, hole 0.3, Top Copper to Bottom Copper, 40 vias
v2: diameter 0.6, hole 0.3, Top Copper to Bottom Copper, 31 vias

## Nets (pads, with @x,y where several pads share a name; then routed paths per layer and width w, separated by ;. In a path a pad name is that pad's centre, name@x,y a point inside that pad or via, vN(x,y) a via of type N, cw(c..) or ccw(c..) an arc to the next point about the centre after c; other vN are vias at no path point)
CAM1_CK_N: J2.8 J.149 | length 78.8
  Top Copper w0.089: J.149 30.544,-67.6 30.754,-67.39 33.839,-67.39 35.3,-65.929 35.3,-35.01 36.2,-34.11 69.22,-34.11 71.485,-31.845 74.551,-31.845 74.706,-32 J2.8
CAM1_CK_P: J2.9 J.147 | length 78.8
  Top Copper w0.089: J.147 30.544,-67 30.744,-67.2 33.76,-67.2 35.11,-65.85 35.11,-34.931 36.121,-33.919 69.142,-33.919 71.406,-31.655 74.551,-31.655 74.706,-31.5 J2.9
CAM1_D0_N: J2.2 J.161 | length 80.6
  Top Copper w0.089: J.161 30.544,-71.2 30.749,-70.995 33.924,-70.995 36.04,-68.879 36.04,-35.31 36.505,-34.845 74.551,-34.845 74.706,-35 J2.2
CAM1_D0_P: J2.3 J.159 | length 80.6
  Top Copper w0.089: J.159 30.544,-70.6 30.749,-70.805 33.845,-70.805 35.85,-68.8 35.85,-35.231 36.426,-34.655 74.551,-34.655 74.706,-34.5 J2.3
CAM1_D1_N: J2.5 J.155 | length 80.1
  Top Copper w0.089: J.155 30.544,-69.4 30.744,-69.2 34.527,-69.2 35.672,-68.055 35.672,-35.157 36.353,-34.477 69.373,-34.477 70.505,-33.345 74.551,-33.345 74.706,-33.5 J2.5
CAM1_D1_P: J2.6 J.153 | length 80.1
  Top Copper w0.089: J.153 30.544,-68.8 30.754,-69.01 34.449,-69.01 35.482,-67.976 35.482,-35.079 36.274,-34.287 69.294,-34.287 70.426,-33.155 74.551,-33.155 74.706,-33 J2.6
CAM1_D2_N: J2.11 J.143 | length 77.4
  Top Copper w0.089: J.143 30.544,-65.8 30.754,-65.59 33.01,-65.59 34.932,-63.668 34.932,-34.857 36.049,-33.74 69.06,-33.74 72.45,-30.35 74.556,-30.35 74.706,-30.5 J2.11
CAM1_D2_P: J2.12 J.141 | length 77.5
  Top Copper w0.089: J.141 30.544,-65.2 30.744,-65.4 32.931,-65.4 34.742,-63.589 34.742,-34.779 35.971,-33.55 68.981,-33.55 72.371,-30.16 74.546,-30.16 74.706,-30 J2.12 J2.12@75.25,-30.05
CAM1_D3_N: J2.14 J.137 | length 76.5
  Top Copper w0.089: J.137 30.544,-64 30.749,-63.795 32.955,-63.795 34.564,-62.186 34.564,-34.705 35.897,-33.372 68.907,-33.372 73.435,-28.845 74.551,-28.845 74.706,-29 J2.14
CAM1_D3_P: J2.15 J.135 | length 76.5
  Top Copper w0.089: J.135 30.544,-63.4 30.749,-63.605 32.876,-63.605 34.374,-62.107 34.374,-34.626 35.818,-33.182 68.829,-33.182 73.356,-28.655 74.551,-28.655 74.706,-28.5 J2.15
CM_1V8: C3.1 IC5.2 IC5.4 J.183 J.184 J.185 J.186 R1.2 R8.2 | length 224
  Top Copper w0.3: J.184 39.25,-78.1 39.8,-78.65 v1(40.05,-78.65)
  Top Copper w0.381: J.183 J.185 33.3,-78.4 33.6,-78.7 J.186 J.184
  Top Copper w0.5: R1.2 15.5,-77.9 15.95,-77.45 15.95,-76.7 v1(15.9,-76.65) ; R8.2 v1(17.7,-18.8) ; v1(63,-63.15) 63.04,-63.11 C3.1
  Top Copper w1: C3.1 67.81,-63.11 68.3,-63.6 IC5.2 IC5.4
  Signal Layer 2 w0.5: v1(17.7,-18.8) 17.75,-18.75 17.75,-15.6 18.5,-14.85 26.15,-14.85 26.7,-15.4 68.05,-15.4 77.9,-25.25 77.9,-41.35 74.9,-44.35 72.15,-44.35 70.15,-46.35 70.15,-56.9 68.7,-58.35 65.05,-58.35 63,-60.4 v1(63,-63.15) 50.55,-75.6 45,-75.6 41.95,-78.65 v1(40.05,-78.65)
  Bottom Copper w0.5: v1(15.9,-76.65) 15.6,-76.35 14.15,-76.35 13.75,-76.75 12.15,-76.75 10.95,-77.95 10.95,-81.35 13.25,-83.65 13.25,-86.55 14.25,-87.55 14.8,-88.1 29.7,-88.1 31.95,-85.85 31.95,-81.1 34.4,-78.65 v1(40.05,-78.65)
CM_3V3: C1.1 IC4.2 IC4.4 J2.22 J.4 J.6 J.39 J.40 J.41 J.42 J.191 J.192 J.193 J.194 P1.1 P1.17 R2.1 R3.1 R6.2 R9.2 | length 259.6
  Top Copper w0.3: J.41@29.55,-35.15 J.41 32.6,-35.2 v1(32.9,-35.5) 32.95,-35.45 32.95,-31.3 ; J.39@29.55,-31.05 J.39 32.65,-31 32.95,-31.3 ; v1(34.9,-20.8) 35.2,-20.5 J.4 J.6 ; J.192 39.3,-80.5 39.55,-80.75 v1(40.05,-80.75) ; J.42 v1(39.75,-35.5) ; J.40 32.95,-31.3 ; R2.1 67.65,-16.35 68.85,-17.55 68.85,-19.95 73.9,-25 J2.22
  Top Copper w0.381: J.191 J.193 32.9,-80.8 33.2,-81.1 J.194 J.192
  Top Copper w0.5: v1(19.85,-24.45) 21.15,-24.45 21.55,-24.85 R6.2 ; v1(59.5,-74.2) 59.55,-74.15 R9.2 C1.1@66.14,-74.15 ; v1(62.25,-16.4) 62.3,-16.35 R3.1 R2.1
  Top Copper w1: C1.1@66.14,-74.15 C1.1 67.81,-74.21 68.4,-74.8 IC4.2 IC4.4
  Signal Layer 1 w0.5: P1.17 6.6,-44.8 6.6,-28.08 P1.1
  Signal Layer 2 w0.5: P1.1 9.65,-27.53 9.65,-29.8 9.9,-30.05 12.75,-30.05 14.2,-28.6 14.2,-25.3 15.05,-24.45 v1(19.85,-24.45) 22.15,-24.45 23,-23.6 23,-22.8 25.75,-20.05 25.75,-19.65 27.8,-17.6 30.7,-17.6 32.85,-19.75 33.85,-19.75 v1(34.9,-20.8) ; v1(59.5,-74.2) 56.4,-77.3 46,-77.3 42.55,-80.75 v1(40.05,-80.75) 32.7,-80.75 31.05,-79.1 31.05,-59.75 32.9,-57.9 v1(32.9,-35.5) 32.9,-22.8 v1(34.9,-20.8) ; v1(62.25,-16.4) 59.85,-18.8 36.9,-18.8 v1(34.9,-20.8)
  Bottom Copper w0.3: v1(32.9,-35.5) v1(39.75,-35.5)
CM_VBAT: C2.2 C4.2 IC4.3 IC5.3 J1.19 J3.A4 J3.A9 J3.B4 J3.B9 J.197 J.198 J.199 J.200 P1.2 P1.4 P2.3 | length 229.4
  Top Copper w0.2: v1@16.7,-80.1 17.25,-80.1 17.6,-80.45 J1.19
  Top Copper w0.3: v1(16.65,-80.05) v1@16.7,-80.1 ; J.199 J.197 32.85,-82 33.75,-82.9 J.200 J.198 37.75,-82.35 v1(40.05,-82.35)
  Top Copper w1: C2.2 69.1,-78.4 69.75,-77.75 IC4.3 71,-77.1 v1(73.2,-79.3) ; C4.2 69,-67 69.85,-66.15 IC5.3 71.4,-65.9 v1(73.2,-67.7)
  Signal Layer 2 w0.3: P1.2 10.94,-24.69 9.85,-23.6 7.45,-23.6 6.1,-24.95 6.1,-77.7 8.45,-80.05 15.05,-80.05 ; v1(16.65,-80.05) 15.05,-80.05 ; v1(40.05,-82.35) 34.05,-88.35 14.95,-88.35 14.25,-87.65 14.25,-80.85 15.05,-80.05 ; 73.2,-54.05 J3.A4 J3.B9 76.65,-54.05 77.4,-53.3 77.4,-50.5 76.7,-49.8 J3.B4 J3.A9
  Signal Layer 2 w1: P1.4 P1.2 15.02,-22.2 18.94,-22.2 P2.3 ; v1(40.05,-82.35) 70.15,-82.35 v1(73.2,-79.3) v1(73.2,-67.7) 73.2,-54.05
CM_VDAC: J.189 J.190 R9.1 R10.2 | length 36.2
  Top Copper w0.2: R10.2 R9.1
  Top Copper w0.3: J.189 33.1,-79.6 33.4,-79.9 v1(40.05,-79.9)
  Top Copper w0.4: v1(55.8,-76.45) 55.8,-76.4 58.45,-76.4 59.5,-77.45 R10.2
  Signal Layer 2 w0.4: v1(40.05,-79.9) 42.15,-79.9 45.6,-76.45 v1(55.8,-76.45)
EMMC_DISABLE_N: IC2.3 J.2 | length 26.1
  Top Copper w0.381: IC2.3 22.5,-23.1 23.15,-22.45 23.15,-19.45 23.95,-18.65 27,-18.65 28.5,-17.15 28.5,-16.35 29.35,-15.5 37.05,-15.5 37.7,-16.15 J.2
EMMC_EN_N_1V8: IC3.1 J.90 R8.1 | length 73.8
  Top Copper w0.3: v1(8.6,-24.45) 11.9,-21.15 IC3.1 ; J.90 40.95,-49.9 41.55,-49.3 41.55,-36.05 v1(41.5,-36)
  Top Copper w0.381: R8.1 15.1,-18.85 IC3.1
  Signal Layer 2 w0.3: v1(8.6,-24.45) 7.75,-24.45 6.95,-25.25 6.95,-32 7.55,-32.6 18.55,-32.6 20.35,-34.4 v1(26.8,-34.4)
  Bottom Copper w0.3: v1(26.8,-34.4) 28.3,-32.9 38.35,-32.9 40.25,-34.8 41.45,-36 v1(41.5,-36)
GND: C1.2 C2.1 C3.2 C4.1 IC1.2 IC3.2 IC4.1 IC5.1 J1.4 J1.7 J1.10 J1.13 J1.16 J1.S1 J1.S2 J1.S3 J1.S4 J2.1 J2.4 J2.7 J2.10 J2.13 J2.16 J2.19 J2.S1 J2.S2 J3.A1 J3.A12 J3.B1 J3.B12 J3.P1 J3.P2 J3.P3 J3.P4 J.1 J.7 J.8 J.13 J.14 J.19 J.20 J.25 J.26 J.31 J.32 J.37 J.38 J.43 J.44 J.49 J.50 J.55 J.56 J.61 J.62 J.67 J.68 J.73 J.74 J.79 J.80 J.85 J.86 J.91 J.92 J.97 J.98 J.103 J.104 J.109 J.110 J.115 J.116 J.121 J.122 J.127 J.133 J.134 J.139 J.140 J.145 J.146 J.151 J.152 J.157 J.163 J.164 J.169 J.170 J.181 J.182 J.187 J.188 J.195 J.196 J.SH1 J.SH2 P1.6 P1.9 P1.14 P1.20 P1.25 P1.30 P1.34 P1.39 P2.1 pad.PTH1 pad.PTH2 pad.PTH3 pad.PTH4 R4.1 R5.1 R7.1 R10.1 | length 6.6
  Top Copper w0.1: J1.16 18.2,-82.2 18.3,-82.1 18.85,-82.1 ; J1.13 18.8,-82.05 18.85,-82.1 ; J1.10 19.4,-82.1 ; J1.7 20,-82.05 ; J1.4 20.6,-82.15 20.55,-82.1 20.05,-82.1 20,-82.05 ; 18.85,-82.1 19.4,-82.1 ; 19.4,-82.1 19.95,-82.1 20,-82.05
  Top Copper w0.2: pad.PTH2 pad.PTH2@77.44,-18.44
GPIO0: J.3 P1.27 | length 61.1
  Top Copper w0.2: v2(24.3,-19.8) 25,-19.8 25.4,-20.2 J.3
  Bottom Copper w0.2: P1.27 6.6,-57.5 6.6,-23.7 8.5,-21.8 10.8,-21.8 12.9,-19.7 24.2,-19.7 v2(24.3,-19.8)
GPIO1: J.5 P1.28 | length 49.8
  Top Copper w0.2: P1.28 13.8,-59.3 14.9,-58.2 14.9,-49.1 20.4,-43.6 20.4,-32.2 24.9,-27.7 24.9,-22.1 26.2,-20.8 J.5
GPIO2: J2.21 J.9 P1.3 R3.2 | length 79
  Top Copper w0.2: v2(27.4,-21.9) 27.5,-22 J.9 ; v1(64.4,-19.1) 64.5,-19 R3.2 ; v1(67.5,-19.2) 67.6,-19.2 68,-19.6 68,-20 73.5,-25.5 J2.21
  Bottom Copper w0.2: P1.3 9.62,-27.6 19.9,-27.6 21.2,-26.3 21.2,-24.4 23.7,-21.9 v2(27.4,-21.9) 31.9,-21.9 34.25,-19.55 63.95,-19.55 v1(64.4,-19.1) 64.95,-18.55 66.8,-18.55 67.45,-19.2 v1(67.5,-19.2)
GPIO3: J2.20 J.11 P1.5 R2.2 | length 80.4
  Top Copper w0.2: v2(26.7,-22.7) 26.8,-22.6 J.11 ; R2.2 v1(66.5,-19.15) 73.35,-26 J2.20
  Bottom Copper w0.2: P1.5 8.74,-31.36 10,-30.1 18.4,-30.1 21.7,-26.8 21.7,-24.7 23.7,-22.7 v2(26.7,-22.7) 32.2,-22.7 34.8,-20.1 65.55,-20.1 v1(66.5,-19.15)
GPIO4: J.15 P1.7 | length 27
  Top Copper w0.2: P1.7 9.7,-32.6 18.1,-32.6 22.7,-28 22.7,-26.6 23.4,-25.9 23.4,-25.5 24.2,-24.7 v2(24.2,-23.8) ; v2(27.4,-23.6) 27.8,-23.6 28,-23.8 J.15
  Bottom Copper w0.2: v2(24.2,-23.8) 24.4,-23.6 v2(27.4,-23.6)
GPIO5: J.17 P1.29 | length 59.9
  Top Copper w0.2: v2(26.7,-24.4) J.17
  Bottom Copper w0.2: P1.29 8.56,-61.84 9.8,-60.6 22.7,-60.6 23.4,-59.9 23.4,-38.5 25.3,-36.6 25.3,-32.1 22.2,-29 22.2,-25.7 23.5,-24.4 v2(26.7,-24.4)
GPIO6: J.21 P1.31 | length 62.1
  Top Copper w0.2: v2(26,-25.4) 27.5,-25.4 27.7,-25.6 J.21
  Bottom Copper w0.2: P1.31 8.62,-64.38 9.9,-63.1 23.3,-63.1 24.1,-62.3 24.1,-38.9 26,-37 26,-31.7 22.7,-28.4 22.7,-26.1 23.4,-25.4 v2(26,-25.4)
GPIO7: J.23 P1.26 | length 43.2
  Top Copper w0.2: P1.26 13.94,-56.76 14.5,-56.2 14.5,-49 20,-43.5 20,-32 24.1,-27.9 v2(24.1,-26.2) ; v2(27.2,-26.2) J.23
  Bottom Copper w0.2: v2(24.1,-26.2) v2(27.2,-26.2)
GPIO8: J.27 P1.24 | length 39.6
  Top Copper w0.2: P1.24 13.48,-54.22 14.1,-53.6 14.1,-48.8 19.6,-43.3 19.6,-31.8 23.4,-28 v2(23.4,-27.4) ; v2(27.2,-27.4) J.27
  Bottom Copper w0.2: v2(23.4,-27.4) v2(27.2,-27.4)
GPIO9: J.29 P1.21 | length 45.5
  Top Copper w0.2: v2(22.3,-31.3) 23,-31.3 26.3,-28 J.29
  Bottom Copper w0.2: P1.21 9.68,-50.4 19.5,-50.4 22.327,-47.573 22.327,-44.427 20.5,-42.6 19.9,-42.6 18.1,-40.8 18.1,-34.7 18.9,-33.9 20.9,-33.9 22.3,-32.5 v2(22.3,-31.3)
GPIO10: J.33 P1.19 | length 34.5
  Top Copper w0.2: v2(21.4,-32.3) 21.6,-32.1 23.1,-32.1 26,-29.2 J.33
  Bottom Copper w0.2: P1.19 8.86,-49.14 10.1,-47.9 12.7,-47.9 17.5,-43.1 17.5,-34.6 18.8,-33.3 20.7,-33.3 21.4,-32.6 v2(21.4,-32.3)
GPIO11: J.35 P1.23 | length 39.7
  Top Copper w0.2: v2(24.6,-32.5) 24.6,-31.6 26.4,-29.8 J.35
  Bottom Copper w0.2: P1.23 8.68,-54.22 9.9,-53 17.6,-53 22.7,-47.9 22.7,-43.4 23,-43.1 23,-38.3 24.6,-36.7 v2(24.6,-32.5)
GPIO12: J.45 P1.32 | length 41.5
  Top Copper w0.2: P1.32 10.96,-64.4 13.7,-64.4 15.3,-62.8 15.3,-49.2 20.8,-43.7 20.8,-37.9 22.3,-36.4 J.45
GPIO13: J.47 P1.33 | length 47.7
  Top Copper w0.2: v2(26.9,-37.1) 27,-37 J.47
  Bottom Copper w0.2: P1.33 9.6,-65.72 9.6,-65.7 9.7,-65.6 22.7,-65.6 24.8,-63.5 24.8,-39.2 v2(26.9,-37.1)
GPIO14: J.51 P1.8 | length 20.3
  Top Copper w0.2: P1.8 13,-33.9 14.3,-35.2 v2(18.8,-35.2) ; v2(22.2,-37.6) 22.8,-38.2 J.51
  Bottom Copper w0.2: v2(18.8,-35.2) 19.8,-35.2 v2(22.2,-37.6)
GPIO15: J.53 P1.10 | length 19.6
  Top Copper w0.2: P1.10 11,-36.5 v2(18.8,-36.5) ; v2(22.2,-38.9) 22.3,-38.8 J.53
  Bottom Copper w0.2: v2(18.8,-36.5) 19.8,-36.5 v2(22.2,-38.9)
GPIO16: J.57 P1.36 | length 42.8
  Top Copper w0.2: P1.36 10.98,-69.5 13.4,-69.5 15.7,-67.2 15.7,-49.3 21.4,-43.6 21.4,-41 22.4,-40 J.57
GPIO17: J.59 P1.11 | length 21.9
  Top Copper w0.2: v2(26.9,-40.8) 27.6,-40.8 27.8,-40.6 J.59
  Signal Layer 2 w0.2: P1.11 9.62,-40.2 21.9,-40.2 22.5,-40.8 v2(26.9,-40.8)
GPIO18: J.63 P1.12 | length 20.5
  Top Copper w0.2: P1.12 11.06,-39.1 v2(18.8,-39.1) ; v2(22.2,-41.8) J.63
  Bottom Copper w0.2: v2(18.8,-39.1) 18.8,-40.5 20.1,-41.8 v2(22.2,-41.8)
GPIO19: J.65 P1.35 | length 44.3
  Top Copper w0.2: v2(26.9,-42.5) 27,-42.4 J.65
  Bottom Copper w0.2: P1.35 8.44,-69.46 9.6,-68.3 21.6,-68.3 25.5,-64.4 25.5,-43.9 v2(26.9,-42.5)
GPIO20: J.69 P1.38 | length 42.4
  Top Copper w0.2: P1.38 14.1,-72 16.1,-70 16.1,-49.4 21.9,-43.6 J.69
GPIO21: J.71 P1.40 | length 44.6
  Top Copper w0.2: P1.40 14.46,-74.54 16.5,-72.5 16.5,-49.5 21.8,-44.2 J.71
GPIO22: J.75 P1.15 | length 22.3
  Top Copper w0.2: v2(26.9,-45.1) 27.4,-45.1 27.7,-45.4 J.75
  Signal Layer 2 w0.2: P1.15 9.7,-45.36 9.7,-45.4 15.7,-45.4 16.2,-45.9 19.5,-45.9 20.3,-45.1 v2(26.9,-45.1)
GPIO23: J.77 P1.16 | length 19.4
  Top Copper w0.2: P1.16 15.26,-44.06 15.9,-44.7 v2(17.2,-44.7) ; v2(21.1,-45.9) 21.2,-46 J.77
  Bottom Copper w0.2: v2(17.2,-44.7) 19.9,-44.7 v2(21.1,-45.9)
GPIO24: J.81 P1.18 | length 19
  Top Copper w0.2: P1.18 11.04,-46.5 v2(15.4,-46.5) ; v2(19.8,-47.2) J.81
  Bottom Copper w0.2: P1.18 P1.18@11.04,-46.5 ; v2(15.4,-46.5) 16.1,-47.2 v2(19.8,-47.2)
GPIO25: J.83 P1.22 | length 21.3
  Top Copper w0.2: v2(17.1,-51.6) 17.1,-49.6 18.9,-47.8 J.83
  Bottom Copper w0.2: P1.22 11.02,-51.6 v2(17.1,-51.6)
GPIO26: J.87 P1.37 | length 39.6
  Top Copper w0.2: v2(27,-49) J.87
  Bottom Copper w0.2: P1.37 8.7,-72 9.9,-70.8 20.6,-70.8 26.2,-65.2 26.2,-49.8 v2(27,-49)
GPIO27: J.89 P1.13 | length 30.1
  Top Copper w0.2: v2(27,-50.2) 27.6,-49.6 J.89
  Signal Layer 2 w0.2: P1.13 7.13,-42.79 7.13,-47.33 7.6,-47.8 12.6,-47.8 13.2,-48.4 17.3,-48.4 18.5,-49.6 26.4,-49.6 v2(27,-50.2)
HDMI_CEC: J1.15 J.171 | length 29.7
  Top Copper w0.089: v1(17.8,-78.95) 18.4,-79.55 J1.15 ; v1(27.8,-74.2) J.171
  Bottom Copper w0.089: v1(17.8,-78.95) 17.8,-80.05 16.95,-80.9 16.95,-84.15 18.3,-85.5 20.55,-85.5 21.6,-84.45 23.55,-84.45 23.85,-84.15 23.85,-78.15 v1(27.8,-74.2)
HDMI_CK_N: J1.14 J.111 | length 39.2
  Top Copper w0.089: v1(18.4,-84.6) 18.6,-84.4 J1.14 ; J.111 30.544,-56.2 30.749,-56.405 31.645,-56.405 31.8,-56.25 v1(31.8,-55.9)
  Bottom Copper w0.089: v1(18.4,-84.6) 18.25,-84.45 18.25,-79.681 31.85,-66.081 31.85,-56.51 31.812,-56.472 31.812,-56.144 31.9,-56.056 31.9,-56 v1(31.8,-55.9)
HDMI_CK_P: J1.12 J.113 | length 39.8
  Top Copper w0.089: v1(18.808,-85.008) 18.808,-83.486 19,-83.294 J1.12 ; J.113 30.544,-56.8 30.749,-56.595 31.765,-56.595 32.052,-56.308 v1(32.208,-56.308)
  Bottom Copper w0.089: v1(18.808,-85.008) 18.796,-84.996 18.796,-84.436 18.44,-84.08 18.44,-79.76 32.04,-66.16 32.04,-56.476 v1(32.208,-56.308)
HDMI_D0_N: J1.11 J.117 | length 31.4
  Top Copper w0.089: J1.11 19.2,-81.056 19.305,-80.951 19.305,-80.071 22.06,-77.316 22.06,-59.271 23.126,-58.205 28.251,-58.205 28.456,-58 J.117
HDMI_D0_P: J1.9 J.119 | length 31.1
  Top Copper w0.089: J1.9 19.6,-81.056 19.495,-80.951 19.495,-80.15 22.25,-77.395 22.25,-59.35 23.205,-58.395 28.251,-58.395 28.456,-58.6 J.119
HDMI_D1_N: J1.8 J.123 | length 37.6
  Top Copper w0.089: J1.8 19.8,-83.294 19.942,-83.436 v1(19.942,-85.008) ; J.123 30.544,-59.8 30.749,-60.005 33.195,-60.005 33.3,-59.9 v1(33.3,-59.6)
  Bottom Copper w0.089: v1(19.942,-85.008) 19.942,-84.439 20.415,-83.965 20.415,-79.885 33.35,-66.95 33.35,-60.21 33.312,-60.172 33.312,-59.844 33.4,-59.756 33.4,-59.7 v1(33.3,-59.6)
HDMI_D1_P: J1.6 J.125 | length 36.4
  Top Copper w0.089: J1.6 20.2,-84.45 v1(20.35,-84.6) ; J.125 30.544,-60.4 30.749,-60.195 33.274,-60.195 33.461,-60.008 v1(33.708,-60.008)
  Bottom Copper w0.089: v1(20.35,-84.6) 20.35,-84.3 20.606,-84.044 20.606,-79.963 33.54,-67.029 33.54,-60.176 v1(33.708,-60.008)
HDMI_D2_N: J1.5 J.129 | length 26.6
  Top Copper w0.089: J1.5 20.4,-81.056 20.505,-80.951 20.505,-80.471 23.41,-77.566 23.41,-62.771 24.376,-61.805 28.251,-61.805 28.456,-61.6 J.129
HDMI_D2_P: J1.3 J.131 | length 26.3
  Top Copper w0.089: J1.3 20.8,-81.056 20.695,-80.951 20.695,-80.55 23.6,-77.645 23.6,-62.85 24.455,-61.995 28.251,-61.995 28.456,-62.2 J.131
HDMI_HPD: IC1.1 J1.1 | length 18.6
  Top Copper w0.089: IC1.1 14.25,-81.8 14.25,-83.9 14.85,-84.5 17.15,-84.5 18.3,-85.65 20.5,-85.65 21.55,-84.6 23.65,-84.6 24.1,-84.15 24.1,-82.1 23.525,-81.525 J1.1
HDMI_HPD_N_1V8: IC1.3 J.88 R1.1 | length 53.3
  Top Copper w0.2: IC1.3 12.3,-78.65 R1.1 13.1,-77.85 v1(13.1,-75.95) ; J.88 v1(40.35,-49.3)
  Signal Layer 2 w0.2: v1(13.1,-75.95) 13.1,-63.65 24.65,-52.1 v1(27,-52.1)
  Bottom Copper w0.2: v1(27,-52.1) 29.85,-52.1 32.65,-49.3 v1(40.35,-49.3)
HDMI_SCL: J1.17 J.175 | length 29.9
  Top Copper w0.089: v1(16.65,-78.95) 16.75,-78.95 18,-80.2 J1.17 ; v1(27.8,-75.4) J.175
  Bottom Copper w0.089: v1(16.65,-78.95) 17.25,-79.55 17.25,-80.25 16.75,-80.75 16.75,-84.25 18.178,-85.678 20.624,-85.678 21.674,-84.628 23.624,-84.628 24.1,-84.151 24.1,-78.35 27.05,-75.4 v1(27.8,-75.4)
HDMI_SDA: J1.18 J.173 | length 32.5
  Top Copper w0.089: v1(14.95,-83.4) 15.85,-84.3 17.35,-84.3 17.8,-83.85 J1.18 ; J.173 v1(31.75,-74.8)
  Bottom Copper w0.089: v1(14.95,-83.4) 15.85,-84.3 16.55,-84.3 16.572,-84.322 16.572,-84.324 18.104,-85.856 20.697,-85.856 21.747,-84.806 23.697,-84.806 24.4,-84.103 24.4,-78.45 26.7,-76.15 30.4,-76.15 v1(31.75,-74.8)
NetD1_1: D1.1 R6.1 | length 3
  Top Copper w0.381: D1.1 R6.1
NetD1_2: D1.2 IC2.2 IC3.3 | length 8
  Top Copper w0.381: D1.2 15.75,-24.95 17.1,-23.6 IC3.3 17.2,-22.2 18.45,-22.2 18.7,-21.95 18.7,-21.5 19.1,-21.1 IC2.2
NetIC2_1: IC2.1 P2.2 R7.2 | length 12.1
  Top Copper w0.381: R7.2 17.6,-14.85 21.35,-14.85 22,-15.5 P2.2 22,-21.05 IC2.1
NetJ3_A5: J3.A5 R4.2 | length 3.8
  Top Copper w0.381: R4.2 71.8,-54 72.6,-53.2 J3.A5
NetJ3_B5: J3.B5 R5.2 | length 13.7
  Top Copper w0.381: R5.2 71.7,-46.1 72.5,-45.3 76.5,-45.3 77,-45.8 77,-50.2 76.55,-50.65 J3.B5
USB_D_N: J3.A7 J.167 | length 78.4
  Top Copper w0.117: 29.1,-72.8 27.6,-72.8 27.3,-73.1 27.3,-85.4 28,-86.1 38.3,-86.1 41.081,-83.319 41.081,-79.009 63.609,-56.481 65.744,-56.481 70.409,-51.816 74.024,-51.816 J3.A7
USB_D_P: J3.A6 J.165 | length 79.1
  Top Copper w0.117: 29.1,-72.581 27.509,-72.581 27.081,-73.009 27.081,-85.491 27.909,-86.319 38.391,-86.319 41.3,-83.41 41.3,-79.1 63.7,-56.7 65.834,-56.7 70.5,-52.034 74.024,-52.034 J3.A6
pads on no net: J1.2 J2.17 J2.18 J3.A8 J3.B6 J3.B7 J3.B8 J. J.10 J.12 J.16 J.18 J.22 J.24 J.28 J.30 J.34 J.36 J.46 J.48 J.52 J.54 J.58 J.60 J.64 J.66 J.70 J.72 J.76 J.78 J.82 J.84 J.93 J.94 J.95 J.96 J.99 J.100 J.101 J.102 J.105 J.106 J.107 J.108 J.112 J.114 J.118 J.120 J.124 J.126 J.128 J.130 J.132 J.136 J.138 J.142 J.144 J.148 J.150 J.154 J.156 J.158 J.160 J.162 J.166 J.168 J.172 J.174 J.176 J.177 J.178 J.179 J.180

## Polygon pours and split planes (outlines as drawn)
GND on Top Copper "Top Copper-GND" (solid, pour order 12): 5.3,-13.9 80.3,-13.9 80.3,-88.9 5.3,-88.9
GND on Bottom Copper "Bottom Copper-GND" (solid, pour order 10): 5.3,-13.9 80.3,-13.9 80.3,-88.9 5.3,-88.9
GND on Signal Layer 1 "Signal Layer 1-GND" (solid, pour order 16): 5.3,-13.9 80.3,-13.9 80.25,-13.95 80.25,-88.85 5.35,-88.85 5.3,-88.9
GND on Signal Layer 2 "Signal Layer 2-GND" (solid, pour order 18): 5.3,-13.9 80.3,-13.9 80.3,-88.7 80.1,-88.9 5.3,-88.9

## Other copper
Top Copper:
  region net GND: 8.2,-89.8

## Panel: embedded boards
"PCB.PcbDoc" at 44.75,-154.4, 1 rows x 1 columns, spacing 63.5 x 38.1, rotation 0

## Text inside footprints (layer, text, board x,y; h text height)
J1: Mechanical 13 "PCB EDGE" at 23.4,-87.925 h0.41
J3: Mechanical 13 ">PCB Edge" at 80.441,-46.222 h1.02 r90
P1: Top Overlay "1" at 7.892,-23.74 h1.27 r270; Top Overlay "2" at 10.432,-23.74 h1.27 r270; Top Overlay "40" at 10.432,-76.572 h1.27 r270; Top Overlay "39" at 7.892,-76.572 h1.27 r270